# Altium PCB GZPCB_v4.PcbDoc
Units mm, origin at the board's own origin, x right, y up, seen from the top; angles counter-clockwise.
Board outline 134 x 134 mm, 4 copper layers (Top Layer, Internal Plane 1, Internal Plane 2, Bottom Layer), stack 0.462 mm thick; 151 components, 83 nets, 396 pads, 70 vias.
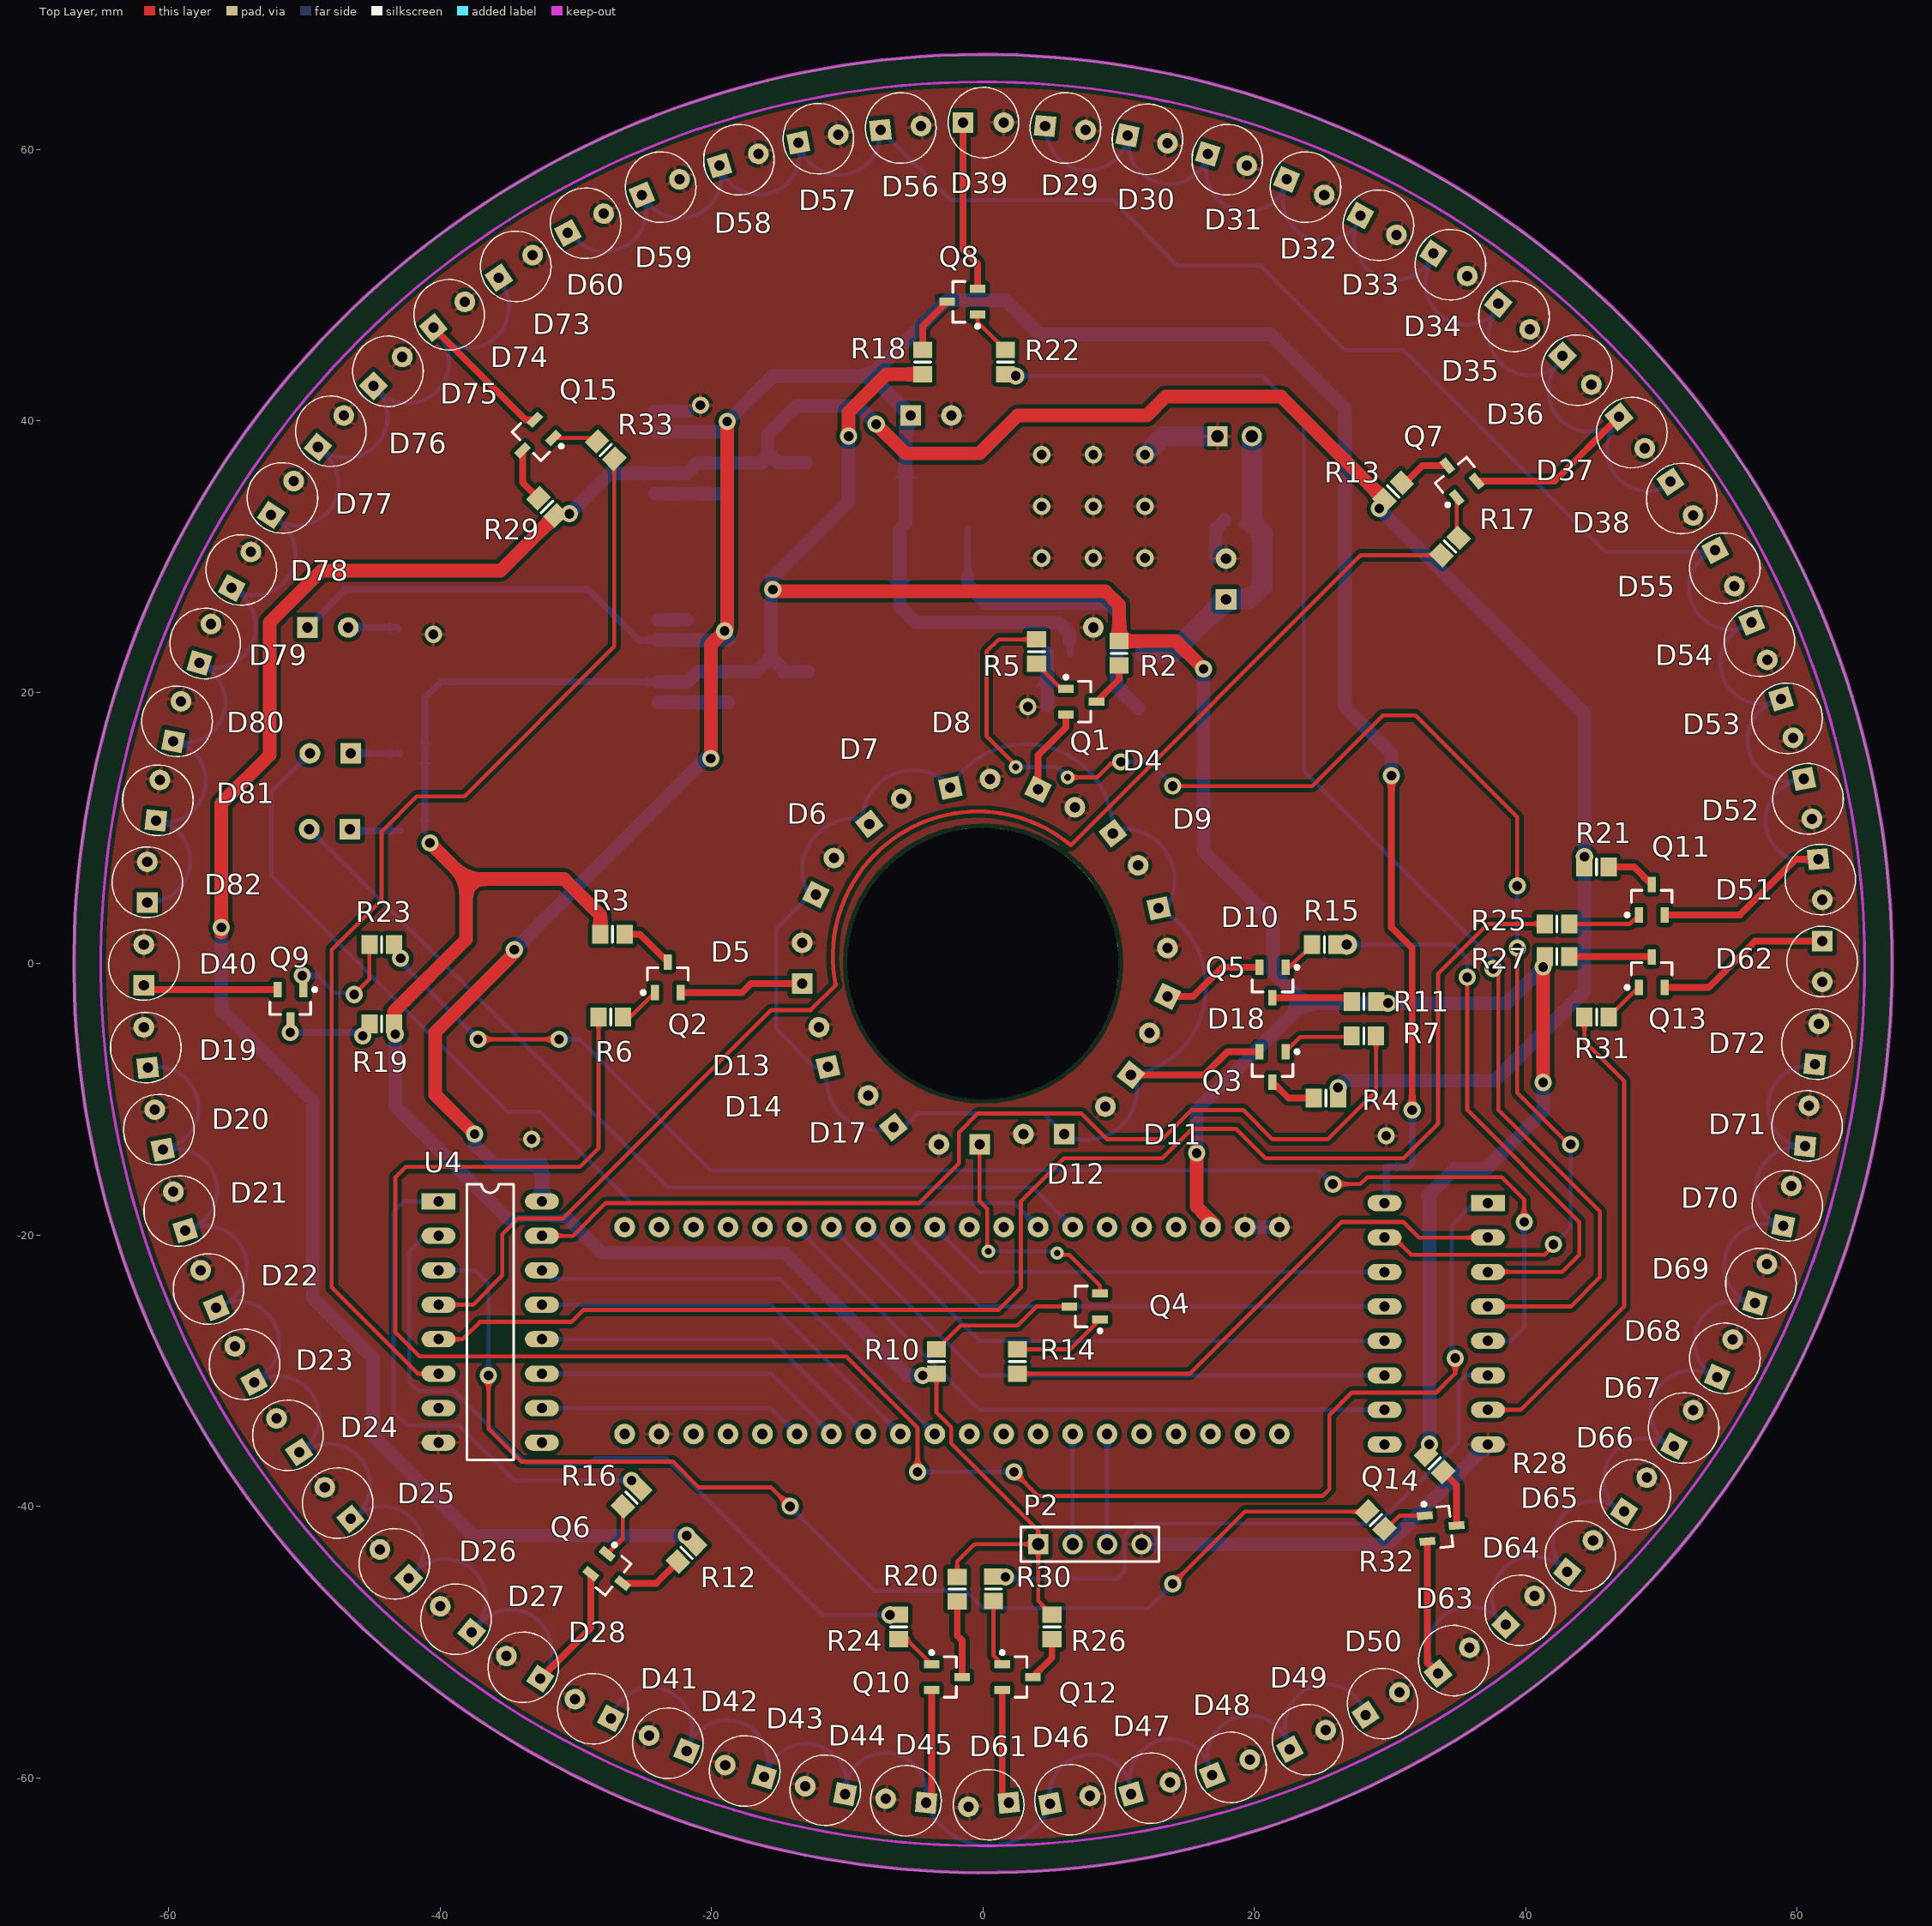
[diagram p0: Top Layer view]
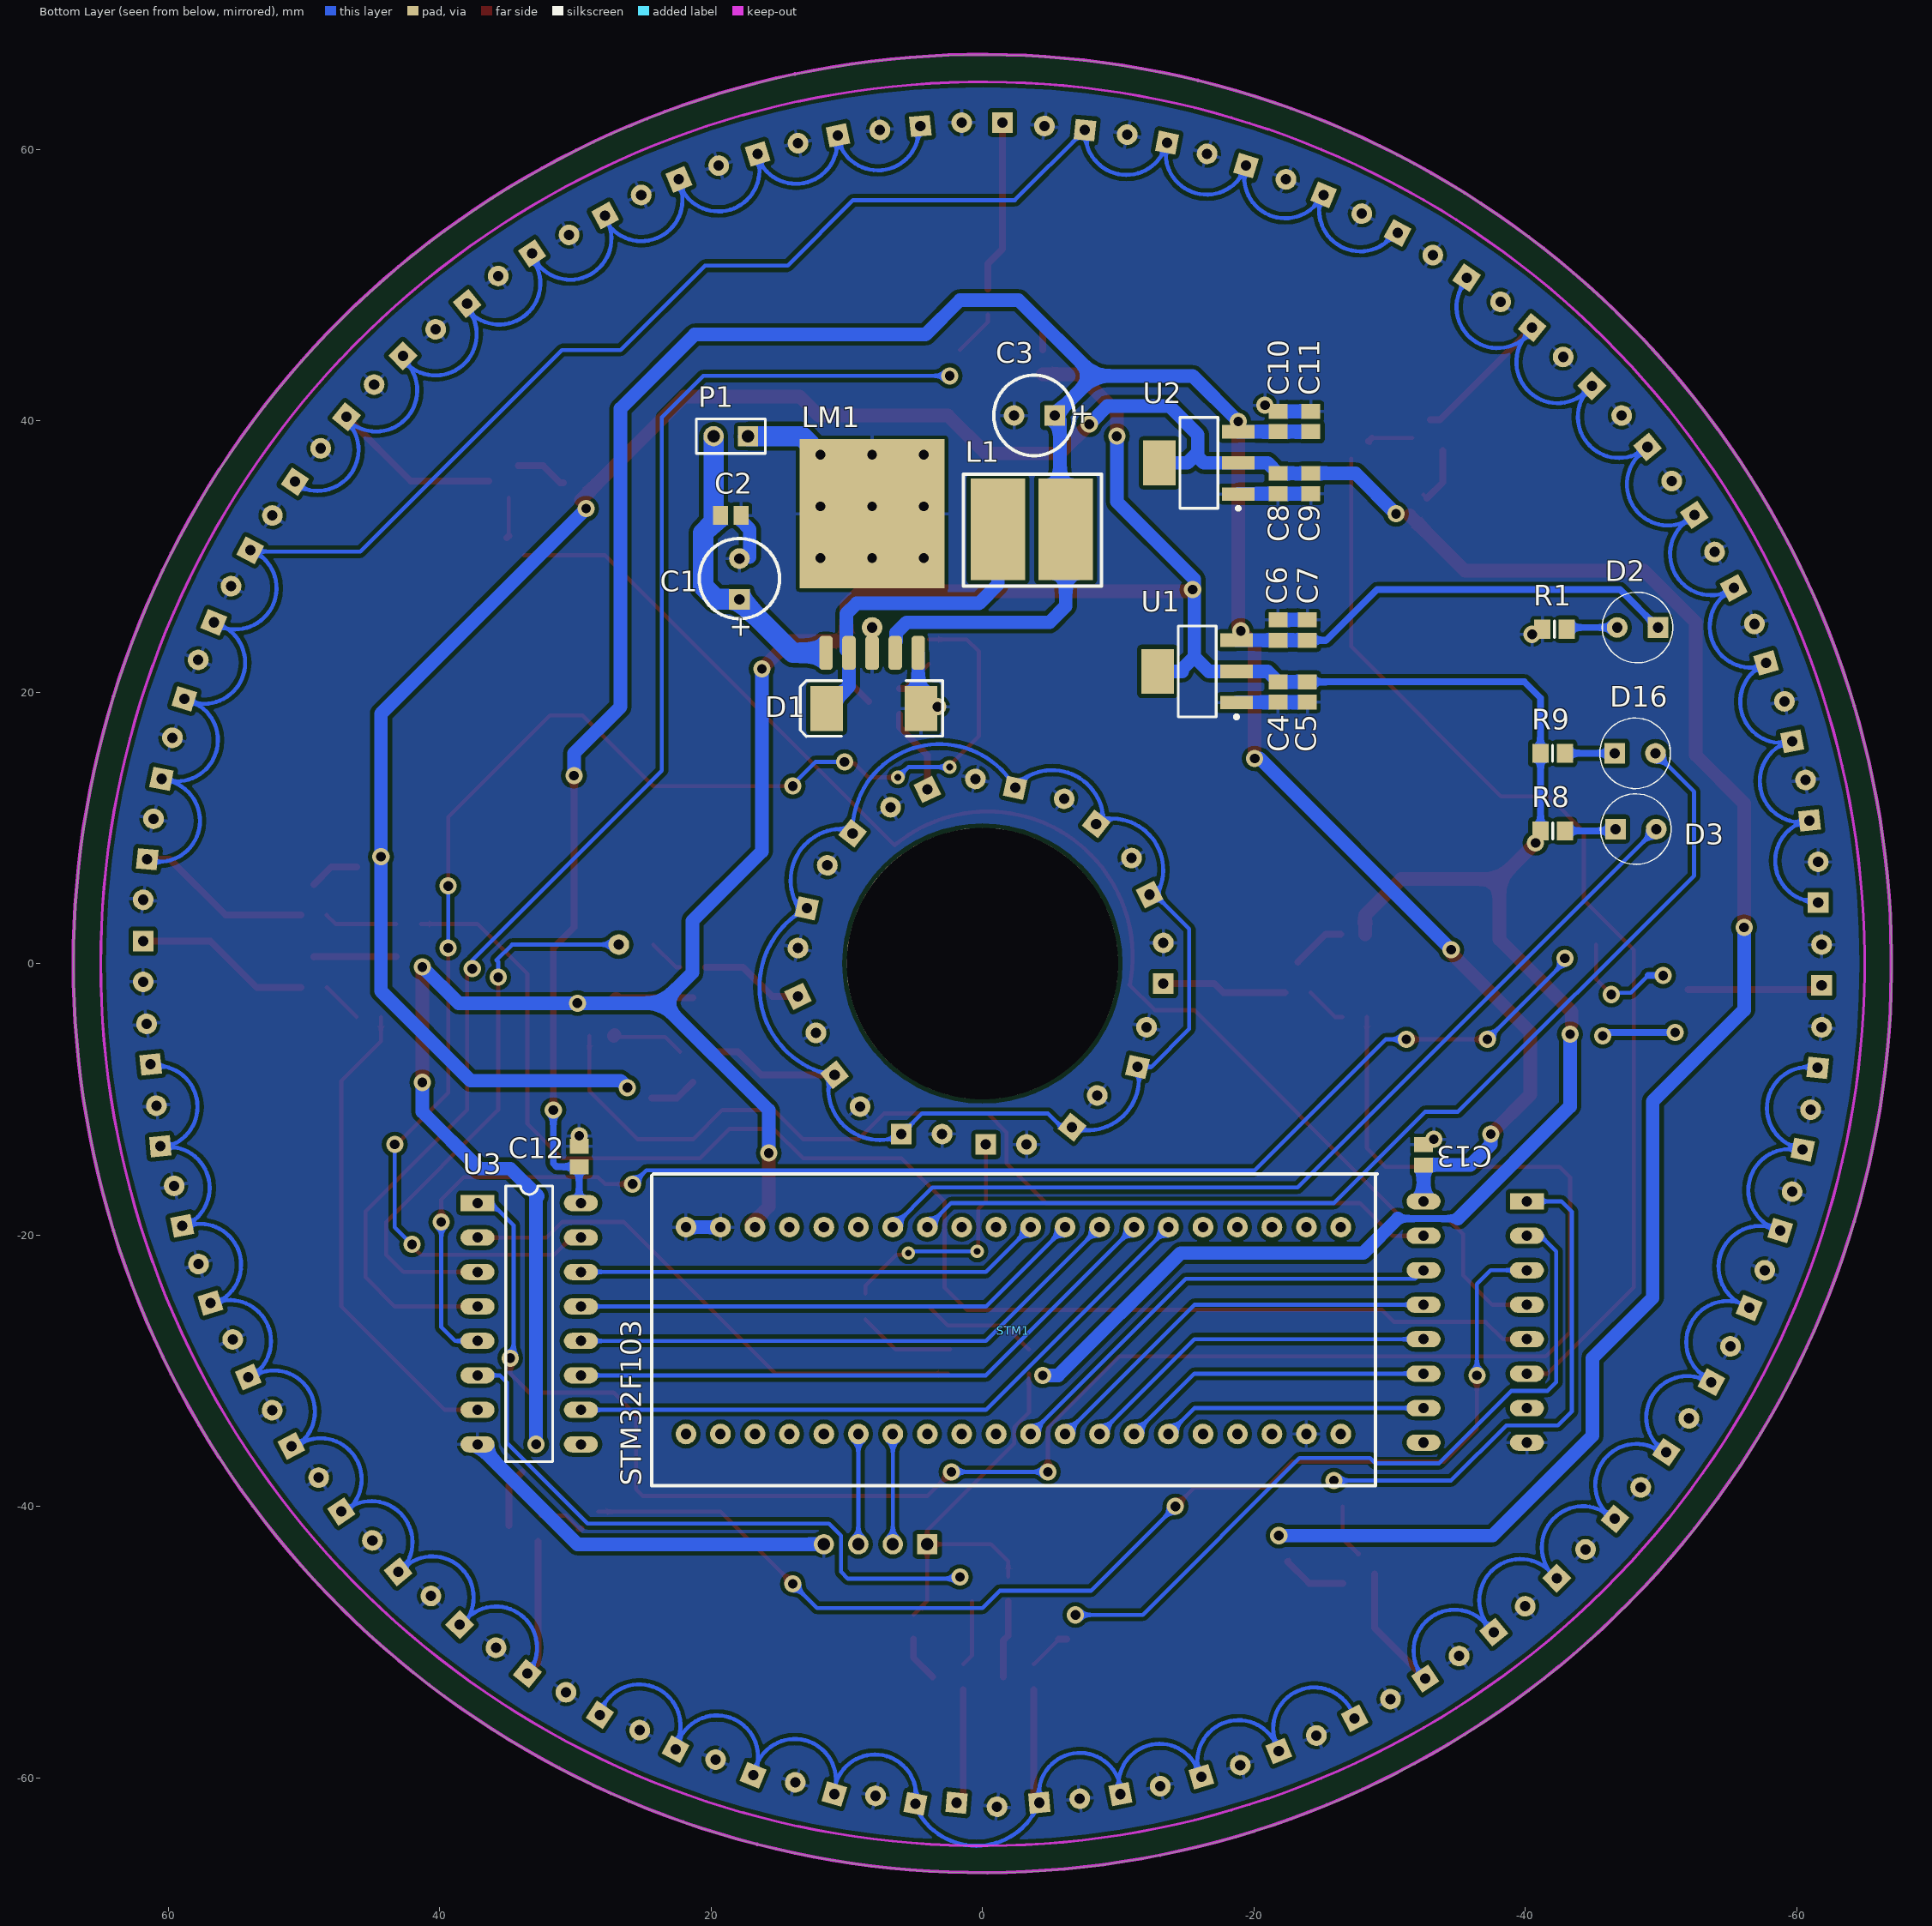
[diagram p1: Bottom Layer view, seen from below]
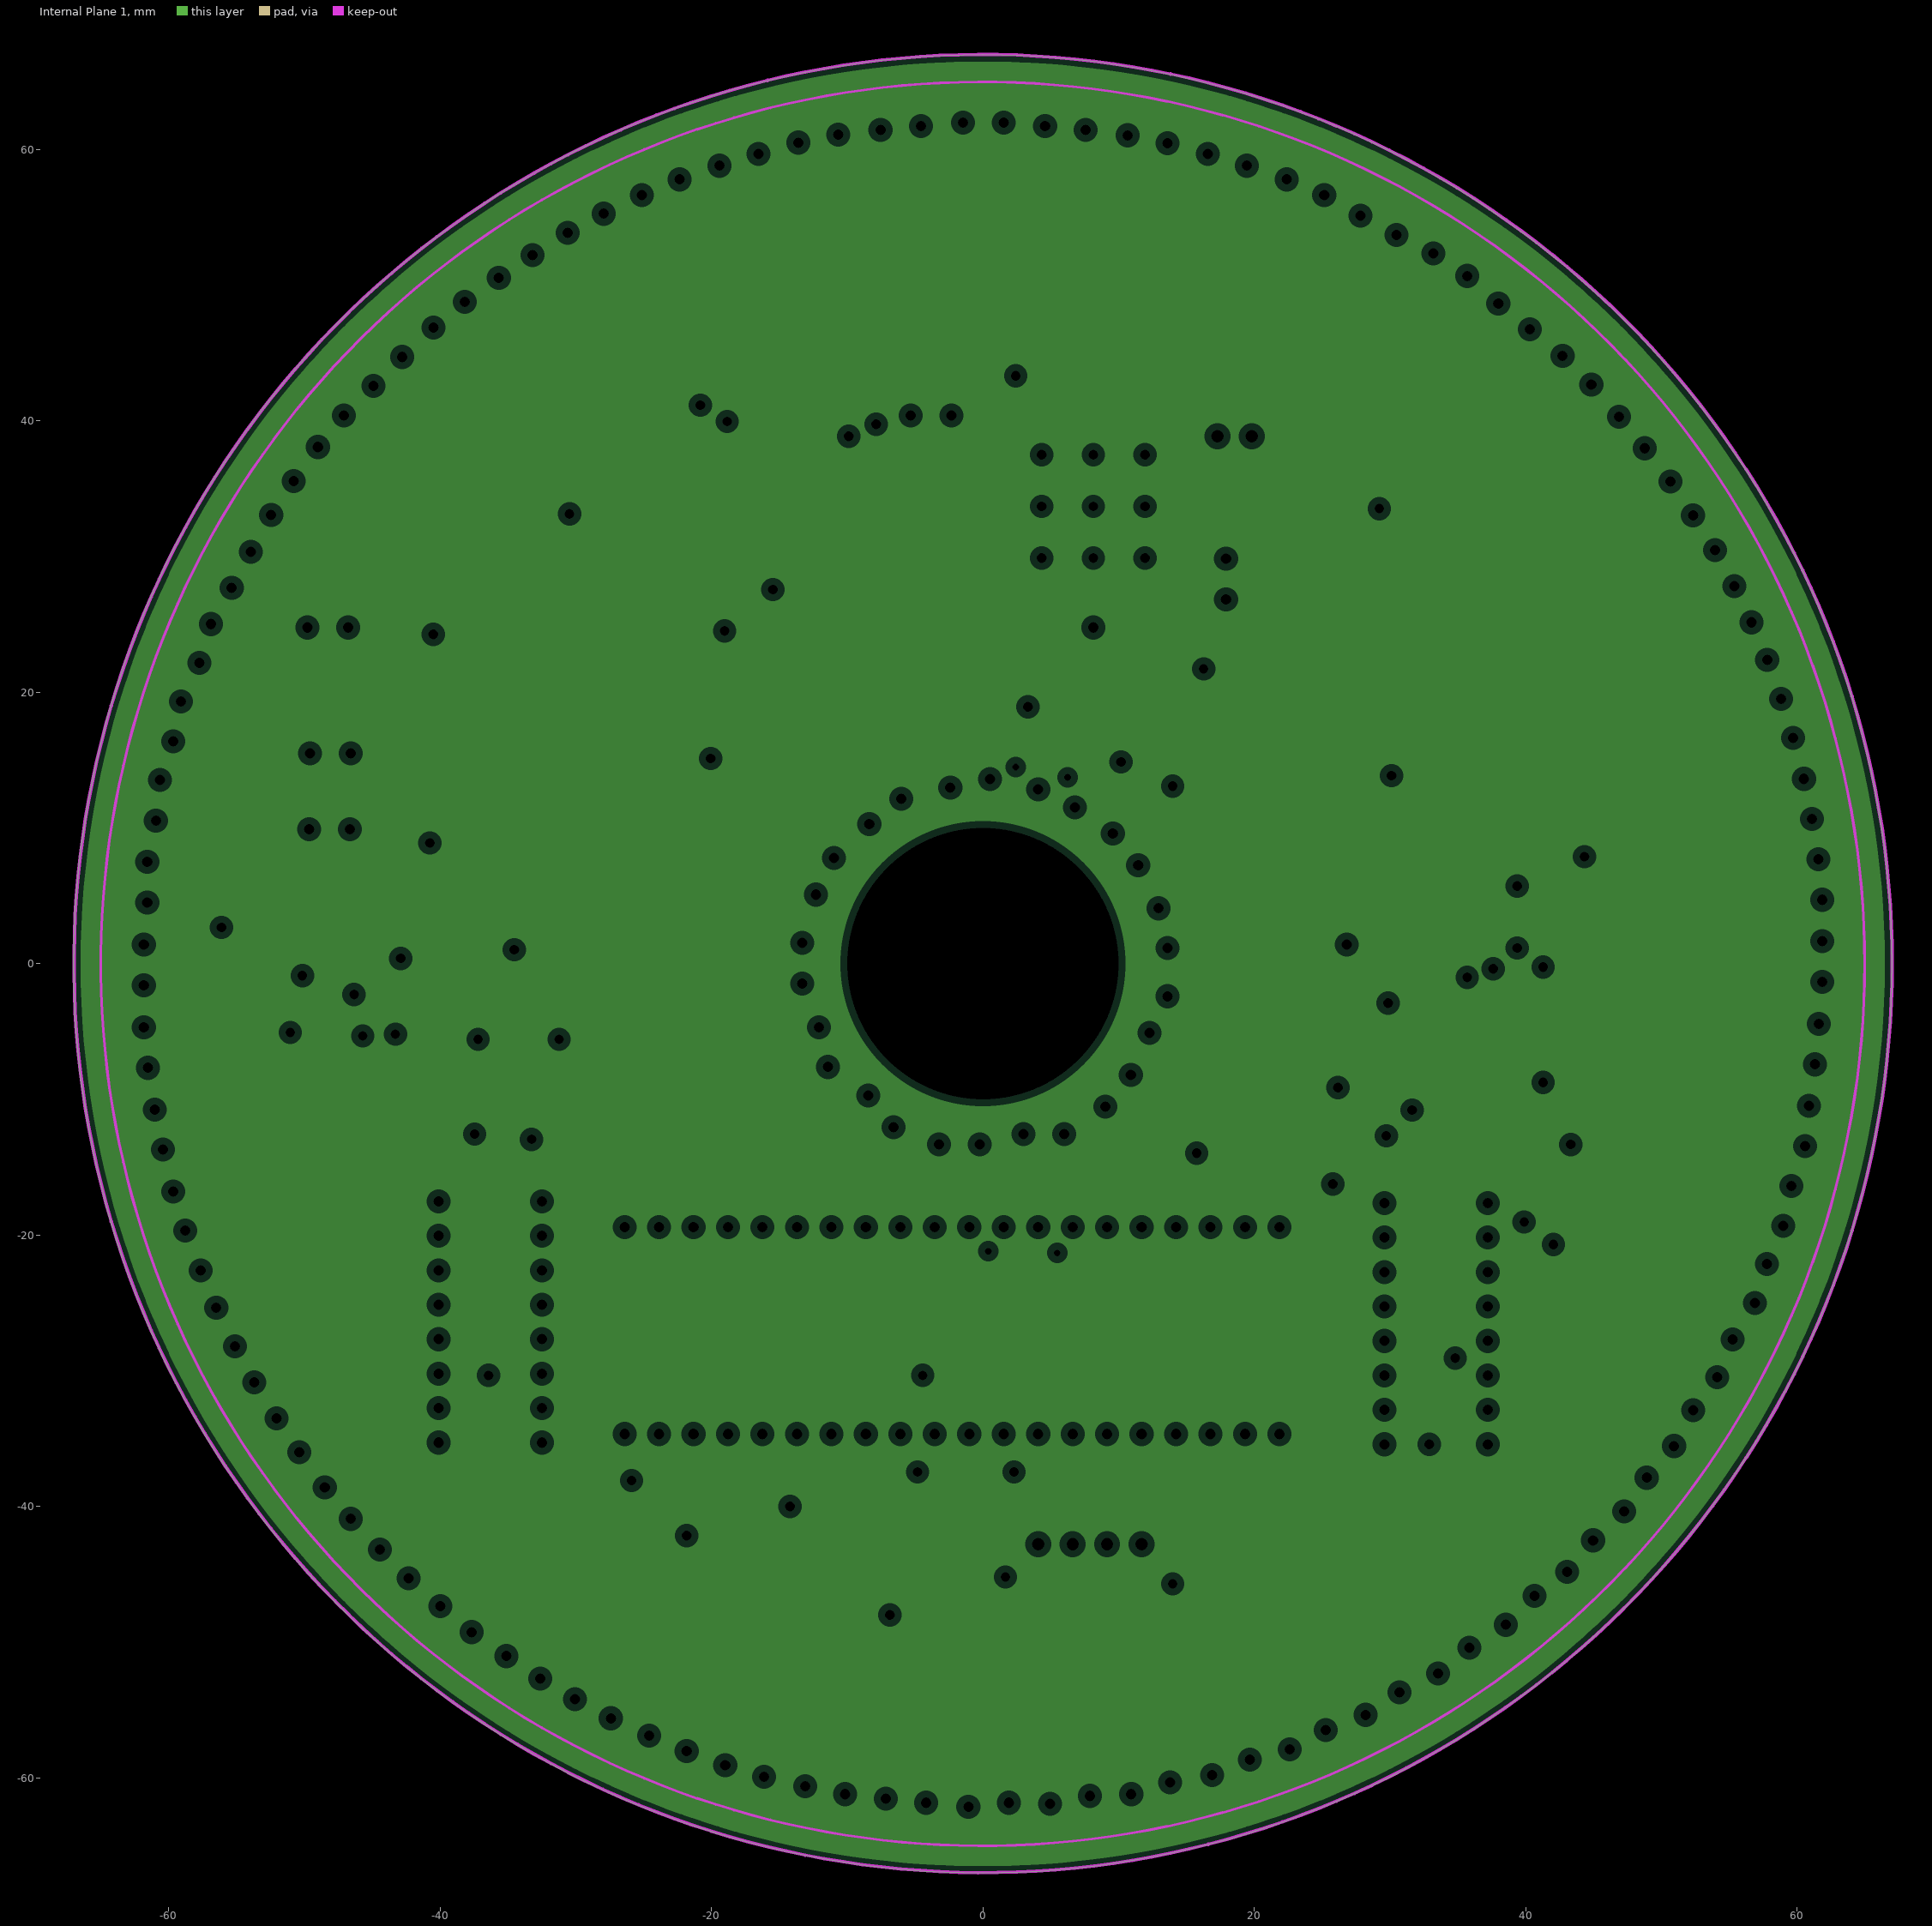
[diagram p2: Internal Plane 1, clearances drawn from the general rule]
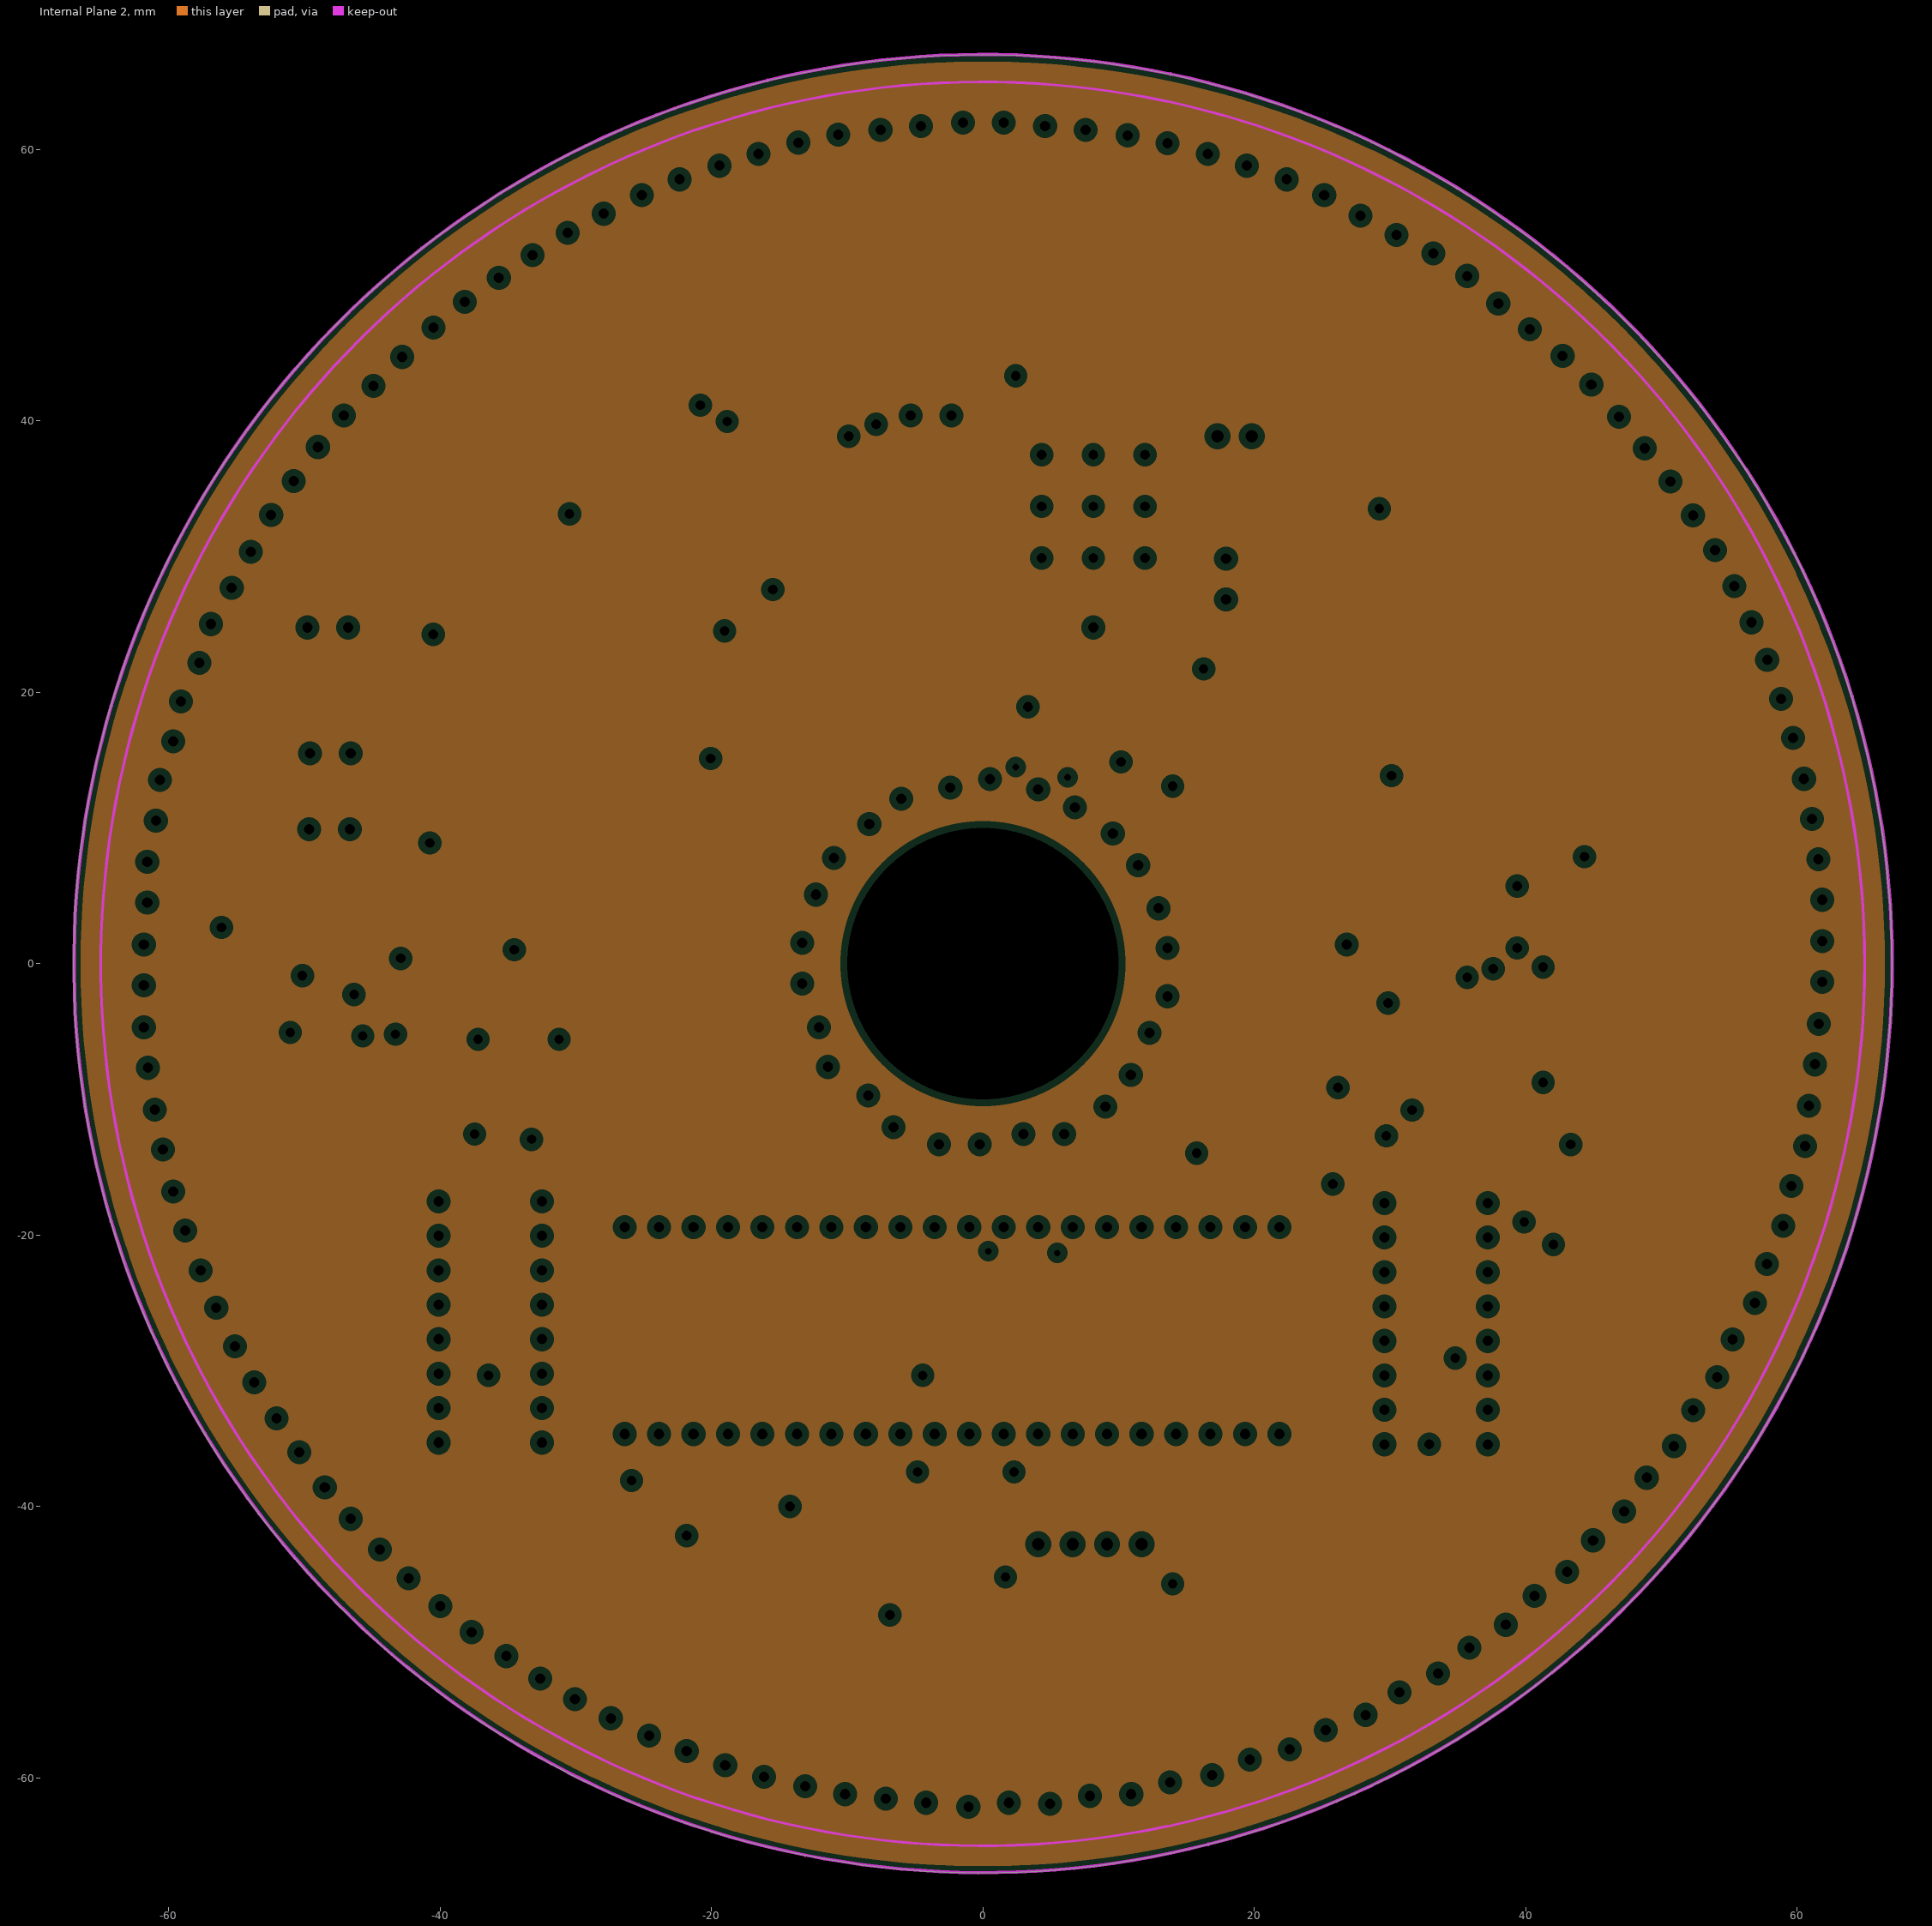
[diagram p3: Internal Plane 2, clearances drawn from the general rule]

## Layer stack, top to bottom
Top Solder: solder mask 0.0102, Solder Resist, Dk 3.5
Top Layer: signal copper 0.0356
Internal Plane 1: plane copper 0.0356
Internal Plane 2: plane copper 0.0356
Dielectric 1: dielectric 0.32, FR-4, Dk 4.8
Bottom Layer: signal copper 0.0356
Bottom Solder: solder mask 0.0102, Solder Resist, Dk 3.5

## Board outline
-0.024,-67.024 cw(c-0.024,-0.024) -67.024,-0.024 cw(c-0.024,-0.024) -0.024,66.976 cw(c-0.024,-0.024) 66.976,-0.024 cw(c-0.024,-0.024)

## Design rules (kind name [scope] priority, off if disabled: settings)
Clearance [All] p1: gap=0.3 ignorepadtopadclearanceinfootprint=FALSE
ComponentClearance [All] p1: gap=0.1 collisioncheckmode=3 verticalgap=0.254 showdistances=FALSE
PlaneClearance [All] p1: clearance=0.508
PlaneConnect [All] p1: planeconnectstyle=Relief reliefexpansion=0.508 reliefentries=4 reliefconductorwidth=0.254 reliefairgap=0.254
PolygonConnect [All] p1: connectstyle=Relief reliefconductorwidth=0.254 reliefentries=4 polygonreliefangle="90 Angle" airgapwidth=0.254
RoutingVias [All] p1: holewidth=0.8 width=1.6 viastyle="Through Hole" minholewidth=0.711 minwidth=1.27 maxholewidth=0.711 maxwidth=1.27
SolderMaskExpansion [All] p1: expansion=0.102
Width [All] p1: maxlimit=1.5 minlimit=0.3 preferedwidth=0.5 minimp=50.000000 maximp=50.000000 favimp=50.000000
27 further rules are at their usual default settings.

## Components (designator, comment, footprint, x,y, rotation, side; value= is the part's Value field where it differs from the comment)
C1 "220uF25V" 3mmcap 17.907,26.845 r90 bottom
C2 "0.1uF(104)" C0805 18.542,33.02 r180 bottom
C3 "220uF25V" 3mmcap -5.334,40.386 r0 bottom
C4 "0.1uF(104)" C0805 -21.794,20.007 r270 bottom value=0.1uF
C5 "100uf(107)" C0805 -23.953,20.007 r270 bottom value=22uF6.3V
C6 "0.1uF(104)" C0805 -21.794,24.579 r90 bottom value=0.1uF
C7 "100uf(107)" C0805 -23.953,24.579 r90 bottom value=100uF
C8 "0.1uF(104)" C0805 -21.794,35.374 r270 bottom value=0.1uF
C9 "100uf(107)" C0805 -24.207,35.374 r270 bottom value=22uF6.3V
C10 "0.1uF(104)" C0805 -21.794,39.946 r90 bottom value=0.1uF
C11 "100uf(107)" C0805 -24.207,39.946 r90 bottom value=100uF
C12 "0.1uF(104)" C0805 29.718,-14.224 r90 bottom value=104
C13 "0.1uF(104)" C0805 -32.512,-14.097 r90 bottom value=104
D1 "ES2D" SMC 8.001,18.796 r0 bottom
D2 "PWR" 3mm -49.784,24.765 r0 bottom
D3 "BLUE" 3mm -46.657,9.906 r180 bottom
D4 "LED0" 5mm 4.064,12.827 r334.1 top
D5 "LED0" 5mm -13.335,-1.476 r90 top
D6 "LED0" 5mm -12.319,5.08 r63.7 top
D7 "LED0" 5mm -8.382,10.287 r38.2 top
D8 "LED0" 5mm -2.413,12.954 r12.5 top
D9 "LED0" 5mm 9.567,9.59 r308.4 top
D10 "LED0" 5mm 12.94,4.072 r282.5 top
D11 "LED0" 5mm 10.893,-8.2 r231.3 top
D12 "LED0" 5mm 5.969,-12.573 r179.9 top
D13 "LED0" 5mm -11.43,-7.62 r102.8 top
D14 "LED0" 5mm -6.604,-12.065 r128.5 top
D16 "GREEN" 3mm -46.609,15.494 r180 bottom
D17 "LED0" 5mm -0.254,-13.335 r180 top
D18 "LED0" 5mm 13.589,-2.413 r243.9 top
D19 "LED0" 3mm -61.555,-7.685 r95.62 top
D20 "LED0" 3mm -60.452,-13.716 r101.25 top
D21 "LED0" 3mm -58.801,-19.685 r106.88 top
D22 "LED0" 3mm -56.51,-25.378 r112.5 top
D23 "LED0" 3mm -53.721,-30.861 r118.12 top
D24 "LED0" 3mm -50.403,-36.022 r123.75 top
D25 "LED0" 3mm -46.611,-40.927 r129.38 top
D26 "LED0" 3mm -42.329,-45.301 r135 top
D27 "LED0" 3mm -37.686,-49.274 r140.62 top
D28 "LED0" 3mm -32.639,-52.705 r146.25 top
D29 "LED0" 3mm 4.572,61.722 r354.38 top
D30 "LED0" 3mm 10.647,61.037 r348.75 top
D31 "LED0" 3mm 16.56,59.672 r343.12 top
D32 "LED0" 3mm 22.374,57.79 r337.5 top
D33 "LED0" 3mm 27.813,55.118 r331.88 top
D34 "LED0" 3mm 33.193,52.34 r326.25 top
D35 "LED0" 3mm 37.973,48.641 r320.62 top
D36 "LED0" 3mm 42.71,44.793 r315 top
D37 "LED0" 3mm 46.865,40.292 r309.38 top
D38 "LED0" 3mm 50.657,35.514 r303.75 top
D39 "LED0" 3mm -1.476,61.976 r0 top
D40 "LED0" 3mm -61.849,-1.603 r90 top
D41 "LED0" 3mm -27.432,-55.626 r151.88 top
D42 "LED0" 3mm -21.844,-58.039 r157.5 top
D43 "LED0" 3mm -16.129,-59.944 r163.12 top
D44 "LED0" 3mm -10.16,-61.214 r168.75 top
D45 "LED0" 3mm -4.191,-61.849 r174.38 top
D46 "LED0" 3mm 4.932,-61.926 r11.25 top
D47 "LED0" 3mm 10.922,-61.214 r16.88 top
D48 "LED0" 3mm 16.891,-59.817 r22.5 top
D49 "LED0" 3mm 22.606,-57.912 r28.12 top
D50 "LED0" 3mm 28.194,-55.372 r33.75 top
D51 "LED0" 3mm 61.555,7.685 r275.62 top
D52 "LED0" 3mm 60.502,13.61 r281.25 top
D53 "LED0" 3mm 58.819,19.508 r286.88 top
D54 "LED0" 3mm 56.642,25.146 r292.5 top
D55 "LED0" 3mm 53.958,30.459 r298.12 top
D56 "LED0" 3mm -7.558,61.428 r5.62 top
D57 "LED0" 3mm -13.61,60.502 r11.25 top
D58 "LED0" 3mm -19.431,58.801 r16.88 top
D59 "LED0" 3mm -25.146,56.642 r22.5 top
D60 "LED0" 3mm -30.607,53.848 r28.12 top
D61 "LED0" 3mm 1.905,-61.849 r185.62 top
D62 "LED0" 3mm 61.849,1.651 r270 top
D63 "LED0" 3mm 33.528,-52.324 r39.38 top
D64 "LED0" 3mm 38.519,-48.73 r45 top
D65 "LED0" 3mm 43.053,-44.831 r50.62 top
D66 "LED0" 3mm 47.244,-40.386 r56.25 top
D67 "LED0" 3mm 50.927,-35.56 r61.88 top
D68 "LED0" 3mm 54.102,-30.48 r67.5 top
D69 "LED0" 3mm 56.896,-25.019 r73.12 top
D70 "LED0" 3mm 58.978,-19.325 r78.75 top
D71 "LED0" 3mm 60.579,-13.462 r84.38 top
D72 "LED0" 3mm 61.301,-7.431 r84.38 top
D73 "LED0" 3mm -35.687,50.546 r33.75 top
D74 "LED0" 3mm -40.513,46.863 r39.38 top
D75 "LED0" 3mm -44.92,42.583 r45 top
D76 "LED0" 3mm -49.02,38.067 r50.62 top
D77 "LED0" 3mm -52.467,33.066 r56.25 top
D78 "LED0" 3mm -55.372,27.686 r61.88 top
D79 "LED0" 3mm -57.767,22.148 r73.12 top
D80 "LED0" 3mm -59.69,16.383 r78.75 top
D81 "LED0" 3mm -60.96,10.541 r84.38 top
D82 "LED0" 3mm -61.595,4.493 r90 top
L1 "Inductor" 7*7mm贴片电感 -1.143,32.004 r180 bottom value=33uH
LM1 "U1" TO-263-5 8.128,22.897 r180 bottom
P1 "Header 2" HDR1X2 17.272,38.862 r0 bottom
P2 "Header 4" HDR1X4 4.064,-42.799 r0 top
Q1 "QNPN" SOT-23B_N 7.239,19.304 r0 top
Q2 "QNPN" SOT-23B_N -23.241,-1.016 r90 top
Q3 "QNPN" SOT-23B_N 21.336,-7.62 r270 top
Q4 "QNPN" SOT-23B_N 7.493,-25.273 r180 top
Q5 "QNPN" SOT-23B_N 21.336,-1.397 r270 top
Q6 "QNPN" SOT-23B_N -27.432,-44.958 r320.62 top
Q7 "QNPN" SOT-23B_N 34.925,35.814 r129.38 top
Q8 "QNPN" SOT-23B_N -1.524,48.768 r180 top
Q9 "QNPN" SOT-23B_N -51.054,-3.048 r270 top
Q10 "QNPN" SOT-23B_N -2.667,-52.578 r0 top
Q11 "QNPN" SOT-23B_N 49.276,4.699 r90 top
Q12 "QNPN" SOT-23B_N 2.54,-52.578 r0 top
Q13 "QNPN" SOT-23B_N 49.276,-0.635 r90 top
Q14 "QNPN" SOT-23B_N 33.782,-41.529 r5.62 top
Q15 "QNPN" SOT-23B_N -33.147,38.608 r225 top
R1 "Res2" 6-0805_N -42.164,24.638 r180 bottom value=1K
R2 "Res2" 6-0805_N 10.033,22.86 r270 top value=150
R3 "Res2" 6-0805_N -27.305,2.159 r0 top value=150
R4 "Res2" 6-0805_N 25.273,-9.906 r180 top value=15
R5 "Res2" 6-0805_N 3.937,22.987 r90 top value=1K
R6 "Res2" 6-0805_N -27.432,-3.937 r180 top value=1K
R7 "Res2" 6-0805_N 28.067,-5.334 r0 top value=1K
R8 "Res2" 6-0805_N -42.037,9.779 r0 bottom value=330R
R9 "Res2" 6-0805_N -42.026,15.494 r0 bottom value=330R
R10 "Res2" 6-0805_N -3.429,-29.337 r90 top value=150
R11 "Res2" 6-0805_N 28.078,-2.794 r180 top value=150
R12 "Res2" 6-0805_N -21.844,-43.434 r225 top value=15
R13 "Res2" 6-0805_N 30.226,34.798 r45 top value=15
R14 "Res2" 6-0805_N 2.54,-29.337 r270 top value=1K
R15 "Res2" 6-0805_N 25.157,1.397 r0 top value=1K
R16 "Res2" 6-0805_N -25.908,-39.37 r45 top value=1K
R17 "Res2" 6-0805_N 34.417,30.734 r225 top value=1K
R18 "Res2" 6-0805_N -4.445,44.323 r90 top value=150
R19 "Res2" 6-0805_N -44.323,-4.445 r180 top value=150
R20 "Res2" 6-0805_N -1.905,-46.101 r270 top value=15
R21 "Res2" 6-0805_N 45.212,7.112 r0 top value=15
R22 "Res2" 6-0805_N 1.651,44.323 r270 top value=1K
R23 "Res2" 6-0805_N -44.323,1.397 r0 top value=1K
R24 "Res2" 6-0805_N -6.223,-48.895 r90 top value=1K
R25 "Res2" 6-0805_N 42.291,2.921 r180 top value=1K
R26 "Res2" 6-0805_N 5.08,-48.895 r270 top value=150
R27 "Res2" 6-0805_N 42.291,0.508 r0 top value=150
R28 "Res2" 6-0805_N 33.274,-36.83 r315 top value=15
R29 "Res2" 6-0805_N -32.131,33.655 r135 top value=15
R30 "Res2" 6-0805_N 0.762,-46.09 r90 top value=1K
R31 "Res2" 6-0805_N 45.223,-3.937 r180 top value=1K
R32 "Res2" 6-0805_N 28.956,-41.021 r135 top value=1K
R33 "Res2" 6-0805_N -27.813,37.846 r315 top value=1K
STM1 "STM32F103C8核心板" STM32F103C8T6 21.844,-34.671 r90 bottom
U1 "AMS1117-3.3" SOT223_N -15.825,21.531 r0 bottom
U2 "AMS1117-3.3" SOT223_N -15.952,36.898 r0 bottom
U3 "74HC595" dip16 37.211,-17.653 r180 bottom
U4 "74HC595" dip16 -40.132,-17.526 r0 top

## Footprints (in the part's own frame and the unit in brackets; to place one, negate y for a bottom-side part, rotate by r counter-clockwise, add the part's x,y. Pads: shape width x height; smd on the part's side, far side on the other; paste and mask are expansions set on the pad)
3mm [mil]
  rect 60x60 hole 30: 1(0,0)
  round 60 hole 30: 2(118.11,0)
  silkscreen extent -43,-102 161,102
3mmcap [mil]
  rect 60x60 hole 30: 1(0,0)
  round 60 hole 30: 2(118.11,0)
  silkscreen extent -57,-117 177,117
5mm [mil]
  rect 60x60 hole 30: 1(0,0)
  round 60 hole 30: 2(118.11,0)
6-0805_N [mm] "Chip Resistor, Body 2.0x1.2mm, IPC Medium Density"
  rect 1.2x1.4 smd: 1(-0.9,0) 2(0.9,0)
  silkscreen extent 0,-0.6 0,0.6, body extent -1.07,-0.7 1.08,0.7, height 0.7
7*7mm贴片电感 [mm]
  rect 4x7.5 smd: 1(0,0) 2(5,0)
  silkscreen extent -2.54,-4.19 7.62,4.06
C0805 [mm] "Chip Capacitor, Body 2.0x1.3mm, IPC High Density"
  rect 1.1x1.4 smd: 1(-0.75,0) 2(0.75,0)
  body extent -1.1,-0.72 1.1,0.72, height 1.4
dip16 [mm]
  rect 2.5x1.2 hole 0.762: 1(0,0)
  oval 2.5x1.2 hole 0.762: 2(0,-2.54) 3(0,-5.08) 4(0,-7.62) 5(0,-10.16) 6(0,-12.7) 7(0,-15.24) 8(0,-17.78) 9(7.62,-17.78) 10(7.62,-15.24) 11(7.62,-12.7) 12(7.62,-10.16) 13(7.62,-7.62) 14(7.62,-5.08) 15(7.62,-2.54) 16(7.62,0)
  silkscreen extent 2.08,-19.05 5.54,1.27
HDR1X2 [mm] "Connector; Header; 2 Position"
  rect 1.5x1.5 hole 0.9: 1(0,0)
  round 1.5 hole 0.9: 2(2.54,0)
  silkscreen extent -1.27,-1.27 3.81,1.27
HDR1X4 [mm] "Connector; Header; 4 Position"
  rect 1.5x1.5 hole 0.9: 1(0,0)
  round 1.5 hole 0.9: 2(2.54,0) 3(5.08,0) 4(7.62,0)
  silkscreen extent -1.27,-1.27 8.89,1.27
SMC [mm] "DO-214-AB/SMC; 2 C-Bend Leads; Body 7.9 x 5.9 mm, inc. leads (LxW)"
  rect 2.4x3.3 smd: 1(-3.475,0) 2(3.475,0)
  silkscreen extent -5.07,-2.05 5.43,2.05
SOT223_N [mm] "SOT223, 4-Leads, Body 6.5x3.5mm, Pitch 2.3mm, Lead Span 7mm, IPC Medium Density"
  rect 2.4x1 smd: 1(-2.9,2.3) 2(-2.9,0) 3(-2.9,-2.3)
  rect 2.4x3.3 smd: 4(2.9,0)
  silkscreen extent -3.02,-3.35 1.4,3.47, body extent -1.85,-3.35 1.85,3.35, height 1.7
SOT-23B_N [mm] "SOT23, 3-Leads, Body 2.9x1.3mm, Pitch 0.95mm, Lead Span 2.4mm, IPC Medium Density"
  rect 1.15x0.6 smd: 1(-1.125,0.95) 2(-1.125,-0.95) 3(1.125,0)
  silkscreen extent -1.25,-1.5 0.7,1.92, body extent -0.7,-1.5 0.7,1.5, height 1.14
STM32F103C8T6 [mil]
  round 60 hole 30: 1(0,0) 2(0,-100) 3(0,-200) 4(0,-300) 5(0,-400) 6(0,-500) 7(0,-600) 8(0,-700) 9(0,-800) 10(0,-900) 11(0,-1000) 12(0,-1100) 13(0,-1200) 14(0,-1300) 15(0,-1400) 16(0,-1500) 17(0,-1600) 18(0,-1700) 19(0,-1800) 20(0,-1900) 21(600,-1900) 22(600,-1800) 23(600,-1700) 24(600,-1600) 25(600,-1500) 26(600,-1400) 27(600,-1300) 28(600,-1200) 29(600,-1100) 30(600,-1000) 31(600,-900) 32(600,-800) 33(600,-700) 34(600,-600) 35(600,-500) 36(600,-400) 37(600,-300) 38(600,-200) 39(600,-100) 40(600,0)
  silkscreen extent -150,-2005 755,100
TO-263-5 [mm]
  rrect50% 1x2.5 smd: 1(-3.4,0) 2(-1.7,0) 3(0,0) 4(1.7,0) 5(3.4,0)
  rect 10.7x11 smd: 3(0,10.25)

## Part data
C1 C3: library part "Cap Pol1", "直插铝电解电容", LatestRevisionDate=17-Jul-2002, LatestRevisionNote="Re-released for DXP Platform.", PackageDescription="Polarized Capacitor (Radial); 2 Leads", PackageReference=RB7.6-15, Published=8-Jun-2000, Publisher="Altium Limited"
C2 C4 C5 C6 C7 C8 C9 C10 C11 C12 C13: library part "Cap Pol3", "Polarized Capacitor (Surface Mount)", LatestRevisionDate=29-May-2009, LatestRevisionNote="IPC-7351 Footprint Added.", PackageDescription="Chip Capacitor", PackageReference=C0805, Published=8-Jun-2000, Publisher="Altium Limited"
D1: library part Diode, "Diode", Code_JEDEC=DO-214-AB, LatestRevisionDate=17-Jul-2002, LatestRevisionNote="Re-released for DXP Platform.", PackageDescription="DO-214-AB/SMC; 2 C-Bend Leads; Body 7.9 x 5.9 mm, inc. leads (LxW)", PackageReference=SMC, PackageVersion=Sep-1996, Published=8-Jun-2000, Publisher="Altium Limited"
D2: library part LED0, "RED-LED", LatestRevisionDate=08-Jul-2005, LatestRevisionNote="Mech Layer 1 removed.", PackageDescription="LED; 2 Leads", PackageReference=LED-0, Published=8-Jun-2000, Publisher="Altium Limited"
D3: library part LED0, "BLUE-LED", LatestRevisionDate=08-Jul-2005, LatestRevisionNote="Mech Layer 1 removed.", PackageDescription="LED; 2 Leads", PackageReference=LED-0, Published=8-Jun-2000, Publisher="Altium Limited"
D4 D5 D6 D7 D8 D9 D10 D11 D12 D13 D14 D17 D18: "850nm IR-LED", LatestRevisionDate=08-Jul-2005, LatestRevisionNote="Mech Layer 1 removed.", PackageDescription="LED; 2 Leads", PackageReference=LED-0, Published=8-Jun-2000, Publisher="Altium Limited"
D16: library part LED0, "GREEN-LED", LatestRevisionDate=08-Jul-2005, LatestRevisionNote="Mech Layer 1 removed.", PackageDescription="LED; 2 Leads", PackageReference=LED-0, Published=8-Jun-2000, Publisher="Altium Limited"
D19 D20 D21 D22 D23 D24 D25 D26 D27 D28 D29 D30 D31 D32 D33 D34 D35 D36 D37 D38 D39 D40 D41 D42 D43 D44 D45 D46 D47 D48 D49 D50 D51 D52 D53 D54 D55 D56 D57 D58 D59 D60 D61 D62 D63 D64 D65 D66 D67 D68 D69 D70 D71 D72 D73 D74 D75 D76 D77 D78 D79 D80 D81 D82: "940nm IR-LED", LatestRevisionDate=08-Jul-2005, LatestRevisionNote="Mech Layer 1 removed.", PackageDescription="LED; 2 Leads", PackageReference=LED-0, Published=8-Jun-2000, Publisher="Altium Limited"
L1: "33uH", Code_IEC=1005, Code_JEITA=0402, LatestRevisionDate=29-May-2009, LatestRevisionNote="IPC-7351 Footprint Added.", PackageDescription="Chip Inductor", PackageReference=0402-A, Published=8-Jun-2000, Publisher="Altium Limited"
LM1: library part LM2596, "LM2596-5.0"
P1: "电源接口", LatestRevisionDate=17-Jul-2002, LatestRevisionNote="Re-released for DXP Platform.", Publisher="Altium Limited"
P2: "串口接口", LatestRevisionDate=17-Jul-2002, LatestRevisionNote="Re-released for DXP Platform.", Publisher="Altium Limited"
Q1 Q2 Q3 Q4 Q5 Q6 Q7 Q8 Q9 Q10 Q11 Q12 Q13 Q14 Q15: "NPN Bipolar Transistor", LatestRevisionDate=29-May-2009, LatestRevisionNote="IPC-7351 Footprint Added.", PackageDescription="3-Pin SOT-23 Package 0.95 mm Pitch, 2.4 mm Lead Span", PackageReference=SOT-23B, PackageVersion=Aug-1999, Published=8-Jun-2000, Publisher="Altium Limited"
R1 R2 R3 R4 R5 R6 R7 R8 R9 R10 R11 R12 R13 R14 R15 R16 R17 R18 R19 R20 R21 R22 R23 R24 R25 R26 R27 R28 R29 R30 R31 R32 R33: "Resistor", LatestRevisionDate=17-Jul-2002, LatestRevisionNote="Re-released for DXP Platform.", PackageDescription="Axial Device, Thru-Hole; 2 Leads; 0.4 in Pin Spacing", PackageReference=AXIAL-0.4, Published=8-Jun-2000, Publisher="Altium Limited"

## Free pads (board coordinates)
  round 20 hole 20 unplated: 17(0,0)
  round 1.524 hole 0.762: 18(8.128,24.765) 19(26.797,1.397)

## Via types
v1: diameter 1.27, hole 0.711, Top Layer to Bottom Layer, 66 vias
v2: diameter 1, hole 0.5, Top Layer to Bottom Layer, 4 vias

## Nets (pads, with @x,y where several pads share a name; then routed paths per layer and width w, separated by ;. In a path a pad name is that pad's centre, name@x,y a point inside that pad or via, vN(x,y) a via of type N, cw(c..) or ccw(c..) an arc to the next point about the centre after c; other vN are vias at no path point)
12V: C1.1 C2.1 LM1.1 P1.2 | length 22
  Bottom Layer w1.5: LM1.1@11.938,22.897 13.959,22.897 C1.1 19.606,26.845 20.574,27.813 20.574,31.738 19.812,32.5 P1.2
+3.3V_1: C4.1 C5.1 P2.1 R2.1 R3.1 R8.2 R9.2 R10.1 R11.1 R18.1 R19.1 R20.1 R26.1 R27.1 R28.1 STM1.38 U1.2 U1.4 | length 320.1
  Top Layer w0.3: R10.1 -3.429,-33.084 -2.344,-34.169 -2.344,-35.375 4.064,-41.783 P2.1 ; R20.1 -1.905,-44.069 -0.635,-42.799 P2.1 ; R26.1 4.064,-46.979 P2.1
  Top Layer w1: R19.1 -43.423,-3.545 -38.1,1.778 -38.1,6.223 ; v1(-40.767,8.89) -38.1,6.223 ; R3.1 -28.205,3.567 -30.861,6.223 -38.1,6.223 ; v1@-15.621,27.686 v1(-15.494,27.559) -15.367,27.432 9.017,27.432 10.033,26.416 R2.1 14.213,23.76 v1@16.129,21.844 ; v1(-9.906,38.862) -9.906,40.64 -7.123,43.423 R18.1 ; v1(15.748,-13.97) 15.748,-17.907 17.018,-19.177 STM1.38 ; v1(41.275,-8.763) v1(41.275,-0.254)
  Bottom Layer w0.3: v1(-4.445,-30.353) v1@-4.191,-30.353
  Bottom Layer w0.5: R8.2 -41.137,15.483 R9.2 -41.126,19.58 -39.949,20.757 C5.1 ; -35.052,-18.796 -30.607,-18.796
  Bottom Layer w1: v1(-43.307,-5.207) -43.307,-10.541 -35.052,-18.796 ; -30.607,-18.796 -28.067,-21.336 -14.605,-21.336 -5.588,-30.353 v1(-4.445,-30.353) ; C5.1 C4.1 -21.02,21.531 U1.2 -16.696,21.531 -15.621,22.606 ; U1.4 -14.732,21.531 -14.732,21.717 -15.621,22.606 ; v1(-9.906,38.862) -9.906,34.036 -15.621,28.321 -15.621,22.606 ; v1(15.748,-13.97) 15.748,-10.795 23.622,-2.921 ; v1(16.256,21.717) 16.256,8.255 21.368,3.143 21.368,-0.667 23.622,-2.921 ; v1(32.893,-35.433) 32.893,-17.272 32.766,-17.145 34.798,-15.113 37.084,-15.113 41.275,-10.922 v1(41.275,-8.763) ; v1(41.275,-0.254) 38.608,-2.921 v1(29.845,-2.921) 23.622,-2.921
+3.3V_2: C8.1 C9.1 R4.1 R12.1 R13.1 R21.1 R29.1 U2.2 U2.4 | length 253.5
  Top Layer w1: v1@-56.134,2.286 v1(-56.134,2.667) -56.134,11.811 -52.578,15.367 -52.578,25.146 -48.768,28.956 -35.557,28.956 R29.1 ; v1(-7.874,39.751) -5.715,37.592 -0.254,37.592 2.54,40.386 12.065,40.386 13.462,41.783 21.968,41.783 R13.1
  Bottom Layer w1: v1(-56.134,2.667) -56.134,-3.429 -49.403,-10.16 -49.403,-24.638 -44.958,-29.083 -44.958,-34.798 -37.592,-42.164 v1(-21.844,-42.164) ; v1(-30.48,33.147) -27.503,36.124 C9.1 C8.1 -21.02,36.898 U2.2 -16.315,36.898 -15.875,37.338 -15.875,37.66 ; U2.4 -15.113,36.898 -15.875,37.66 ; v1@-8.001,39.878 -9.207,41.084 -13.779,41.084 -15.875,38.989 -15.875,37.66 ; v1(26.162,-9.144) 26.67,-8.636 37.719,-8.636 44.323,-2.032 v1(44.323,7.874) 44.323,18.415 v1(29.21,33.528)
+5V: C3.1 C6.1 C7.1 C10.1 C11.1 C12.1 C13.1 D2.1 L1.2 LM1.4 U1.3 U2.3 U3.16 U4.16 | length 259.9
  Top Layer w0.5: v1(30.099,13.843) 30.099,2.667 31.623,1.143 v1(31.623,-10.795)
  Top Layer w1: v1(-37.465,-12.573) -40.386,-9.652 -40.386,-5.08 v1@-34.544,0.762 ; v1(-20.066,15.113) -20.066,23.495 v1(-19.05,24.511) -18.852,24.709 v1(-18.852,39.949)
  Bottom Layer w0.5: D2.1 -46.99,27.559 -29.083,27.559 -25.353,23.829 C7.1 ; C11.1 C11.1 ; U1.3@-18.727,23.829 U1.3 ; L1.2 L1.2@-5.715,32.432 ; C3.1@-5.715,40.005 C3.1 ; LM1.4@6.35,23.749 6.428,23.671 LM1.4 ; U3.16 29.718,-17.526 C12.1 31.381,-14.974 31.623,-14.732 v1(31.623,-10.795)
  Bottom Layer w1: v1@-37.465,-12.446 v1(-37.465,-12.573) -37.465,-13.335 -35.953,-14.847 C13.1 U4.16 U4.16@-32.639,-17.399 ; v1(-34.544,1.016) v1@-20.447,15.113 ; C11.1 U2.3 v1(-18.852,39.949) -15.494,43.307 -8.255,43.307 ; C7.1 C6.1 U1.3@-18.727,23.829 ; v1(-20.066,15.113) v1@-19.939,15.113 ; L1.2 -6.143,26.336 -4.953,25.146 5.588,25.146 6.35,24.384 LM1.4@6.35,23.749 ; L1.2@-5.715,32.432 C3.1@-5.715,40.005 ; C3.1 -8.255,43.307 ; v1(30.099,13.843) 30.099,15.494 26.67,18.923 26.67,40.894 21.209,46.355 4.191,46.355 1.651,48.895 -2.667,48.895 -8.255,43.307
Circle_In: D16.2 STM1.33 | length 77.4
  Bottom Layer w0.3: D16.2 -52.451,12.652 -52.451,6.477 -35.052,-10.922 -32.639,-10.922 -25.908,-17.653 2.286,-17.653 STM1.33
Circle_Out: D3.2 STM1.34 | length 68.4
  Bottom Layer w0.3: D3.2 -23.241,-16.51 3.683,-16.51 STM1.34
CLR_1: STM1.26 U3.10 | length 48.9
  Bottom Layer w0.3: STM1.26 -0.254,-32.893 U3.10
CLR_2: STM1.15 U4.10 | length 19.6
  Bottom Layer w0.3: U4.10 -15.621,-32.766 STM1.15
Data_1: STM1.30 U3.14 | length 34.5
  Bottom Layer w0.3: STM1.30 -0.254,-22.733 U3.14
Data_2: STM1.11 U4.14 | length 34
  Bottom Layer w0.3: U4.14 -31.877,-23.241 -14.986,-23.241 STM1.11
GND: C1.2 C2.2 C3.2 C4.2 C5.2 C6.2 C7.2 C8.2 C9.2 C10.2 C11.2 C12.2 C13.2 D1.1 D4.2 D5.2 D6.2 D7.2 D8.2 D9.2 D10.2 D11.2 D12.2 D13.2 D14.2 D17.2 D18.2 D19.2 D20.2 D21.2 D22.2 D23.2 D24.2 D25.2 D26.2 D27.2 D28.2 D29.2 D30.2 D31.2 D32.2 D33.2 D34.2 D35.2 D36.2 D37.2 D38.2 D39.2 D40.2 D41.2 D42.2 D43.2 D44.2 D45.2 D46.2 D47.2 D48.2 D49.2 D50.2 D51.2 D52.2 D53.2 D54.2 D55.2 D56.2 D57.2 D58.2 D59.2 D60.2 D61.2 D62.2 D63.2 D64.2 D65.2 D66.2 D67.2 D68.2 D69.2 D70.2 D71.2 D72.2 D73.2 D74.2 D75.2 D76.2 D77.2 D78.2 D79.2 D80.2 D81.2 D82.2 LM1.3 LM1.5 P1.1 P2.4 pad.18 R1.1 STM1.19 STM1.39 STM1.40 U1.1 U2.1 U3.8 U4.8 | length 60.5
  Bottom Layer w0.5: U2.1@-18.878,34.624 U2.1 ; U1.1@-18.751,19.257 U1.1 ; D1.1 D1.1@4.728,18.998 ; 17.145,29.972 17.272,29.845 C1.2 ; C2.2@17.792,32.651 C2.2
  Bottom Layer w1: C9.2 C8.2 U2.1@-18.878,34.624 ; C11.2 C10.2 ; C5.2 C4.2 U1.1@-18.751,19.257 ; C7.2 C6.2 ; D1.1@4.728,18.998 LM1.5 ; P2.4 29.845,-42.799 U3.8 ; 17.145,29.972 17.145,32.004 C2.2@17.792,32.651 ; STM1.39 STM1.40
  Bottom Layer w1.5: v1(11.938,37.502) 13.298,38.862 P1.1
  other v1: -33.274,-12.954 29.718,-12.7 3.302,18.923 -40.513,24.257 4.318,29.882 8.128,29.882 11.938,29.882 4.318,33.692 8.128,33.692 11.938,33.692 4.318,37.502 8.128,37.502 -20.828,41.148
Latch_1: STM1.28 U3.12 | length 41.7
  Bottom Layer w0.3: STM1.28 -0.254,-27.813 U3.12
Latch_2: STM1.13 U4.12 | length 26.8
  Bottom Layer w0.3: U4.12 -15.621,-27.686 STM1.13
NetD1_2: D1.2 L1.1 LM1.2 | length 23.9
  Bottom Layer w0.5: L1.1@-1.143,28.448 L1.1
  Bottom Layer w1: L1.1@-1.143,28.448 -1.143,27.94 0.254,26.543 9.271,26.543 10.033,25.781 10.033,23.102 LM1.2 9.828,20.444 D1.2
NetD2_2: D2.2 R1.2 | length 3.8
  Bottom Layer w0.5: D2.2 -43.191,24.765 R1.2
NetD3_1: D3.1 R8.1 | length 3.8
  Bottom Layer w0.5: D3.1 -46.53,9.779 R8.1
NetD4_1: D4.1 Q1.2 | length 6.4
  Top Layer w0.5: D4.1 4.064,15.367 6.114,17.417 Q1.2
NetD5_1: D5.1 Q2.2 | length 9.2
  Top Layer w0.5: Q2.2 -17.762,-2.141 -17.097,-1.476 D5.1
NetD6_1: D6.1 D7.1 D8.1 D9.1 D10.1 D11.1 D12.1 D13.1 D14.1 Q3.2 | length 113.9
  Top Layer w0.5: D11.1 16.311,-8.2 18.016,-6.495 Q3.2
  Bottom Layer w0.3: D6.1@-12.96,5.275 cw(c-9.551,6.901) D7.1@-9.021,10.64 ; D6.1 -12.7,5.08 -15.24,2.54 -15.24,-4.826 -12.446,-7.62 D13.1 ccw(c-7.761,-8.514) -6.604,-12.108 D14.1 -5.842,-12.065 -4.826,-11.049 4.445,-11.049 D12.1 ; D7.1@-8.916,10.649 cw(c-5.144,10.476) D8.1@-2.914,13.524 ; D8.1 cw(c3.15,9.754) D9.1 ; D12.1@5.983,-12.654 ccw(c7.575,-9.23) D11.1@11.309,-8.664 ; D9.1@10.157,9.921 cw(c10.355,6.15) D10.1@13.607,4.23 ; D11.1@11.176,-8.2 ccw(c9.84,-1.745) D10.1
NetD16_1: D16.1 R9.1 | length 3.7
  Bottom Layer w0.5: D16.1 R9.1
NetD17_1: D17.1 Q4.2 | length 17.7
  Top Layer w0.3: D17.1 -0.254,-17.526 0.312,-18.092 0.312,-21.14 v2(0.381,-21.209) ; v2@5.715,-21.463 6.35,-21.463 8.618,-23.731 Q4.2
  Bottom Layer w0.3: v2(0.381,-21.209) 5.334,-21.209 v2(5.461,-21.336)
NetD18_1: D18.1 Q5.2 | length 7.7
  Top Layer w0.5: D18.1 15.494,-2.413 17.635,-0.272 Q5.2
NetD19_1: D19.1 D20.1 D21.1 D22.1 D23.1 D24.1 D25.1 D26.1 D27.1 D28.1 Q6.2 | length 94.1
  Top Layer w0.5: D28.1 -28.904,-48.97 Q6.2
  Bottom Layer w0.3: D19.1@-61.073,-7.632 cw(c-60.854,-10.657) D20.1@-60.54,-13.673 ; D20.1@-59.993,-13.719 cw(c-59.48,-16.707) D21.1@-58.871,-19.678 ; D21.1@-58.089,-19.452 cw(c-57.285,-22.376) -55.778,-25.008 ; D22.1@-56.388,-25.273 ccw(c-57.285,-22.376) -55.778,-25.008 ; D22.1@-55.992,-25.081 cw(c-54.905,-27.912) -55.778,-25.008 ; D23.1@-53.729,-30.707 ccw(c-54.905,-27.912) -55.778,-25.008 ; D23.1@-53.32,-30.725 cw(c-51.961,-33.436) D24.1@-50.517,-36.102 ; D24.1@-49.818,-35.869 cw(c-48.2,-38.434) D25.1@-46.089,-40.61 ; D25.1@-46.501,-40.946 ccw(c-48.2,-38.434) D25.1@-46.089,-40.61 ; D25.1@-46.12,-40.635 cw(c-44.258,-43.028) D25.1@-46.089,-40.61 ; D26.1@-42.321,-45.361 ccw(c-44.258,-43.028) -41.744,-44.724 ; D26.1@-41.948,-44.937 cw(c-39.655,-46.922) -41.744,-44.724 ; D27.1@-37.3,-48.832 ccw(c-39.655,-46.922) -41.744,-44.724 ; D27.1@-37.285,-48.906 cw(c-34.809,-50.656) D28.1@-32.278,-52.327 ; D25.1@-46.089,-40.61 cw(c-44.258,-43.028) -41.744,-44.724
NetD29_1: D29.1 D30.1 D31.1 D32.1 D33.1 D34.1 D35.1 D36.1 D37.1 D38.1 Q7.2 | length 92
  Top Layer w0.5: Q7.2 42.12,35.547 D37.1
  Bottom Layer w0.3: D29.1@4.671,61.425 ccw(c7.703,61.49) D30.1@10.671,60.872 ; D30.1@10.709,60.729 ccw(c13.733,60.497) D31.1@16.627,59.591 ; D31.1@16.474,58.986 ccw(c19.46,58.459) D32.1@22.251,57.274 ; D32.1@22.215,57.088 ccw(c25.136,56.271) 27.491,54.36 ; D33.1@27.55,54.528 ccw(c30.376,53.429) 27.491,54.36 ; D33.1@27.797,54.818 cw(c25.136,56.271) 27.491,54.36 ; D34.1@32.883,51.722 cw(c30.376,53.429) 27.491,54.36 ; D34.1@33.054,51.754 ccw(c35.611,50.124) D35.1@37.699,47.925 ; D35.1@37.736,47.961 cw(c35.611,50.124) D35.1@37.699,47.925 ; D35.1@37.917,48.243 ccw(c40.303,46.37) D35.1@37.699,47.925 ; 42.206,44.009 cw(c40.303,46.37) D35.1@37.699,47.925 ; D36.1@42.493,44.337 ccw(c44.683,42.239) 46.346,39.703 ; D37.1@47.034,40.165 ccw(c49.008,37.863) D38.1@50.414,35.176
NetD39_1: D39.1 Q8.2 | length 12.7
  Top Layer w0.5: D39.1 -1.476,52.657 -0.399,51.58 Q8.2
NetD40_1: D40.1 Q9.2 | length 10.1
  Top Layer w0.5: D40.1 -61.529,-1.923 Q9.2
  Top Layer w1: D40.1 D40.1@-61.77,-1.524
NetD41_1: D41.1 D42.1 D43.1 D44.1 D45.1 D46.1 D47.1 D48.1 D49.1 D50.1 Q10.2 | length 95.5
  Top Layer w0.5: D45.1 -3.792,-61.45 Q10.2
  Bottom Layer w0.3: -27.097,-54.882 cw(c-24.461,-56.381) D42.1@-21.779,-57.796 ; -21.509,-57.295 cw(c-18.873,-58.794) D43.1@-16.191,-60.209 ; D43.1@-15.831,-59.304 cw(c-13.061,-60.537) -10.048,-60.196 ; D44.1@-10.253,-61.682 ccw(c-13.061,-60.537) -10.048,-60.196 ; D44.1@-10.147,-60.539 cw(c-7.189,-61.208) -10.048,-60.196 ; D46.1@4.887,-61.541 cw(c7.911,-61.322) 10.804,-60.414 ; D46.1@4.953,-62.103 cw(c0.436,-60.077) -4.212,-61.782 ccw(c-7.189,-61.208) -10.048,-60.196 ; D47.1@10.839,-60.696 cw(c13.828,-60.182) 10.804,-60.414 ; D47.1@10.922,-60.96 ccw(c7.911,-61.322) 10.804,-60.414 ; D48.1@16.74,-59.53 cw(c19.571,-58.443) 16.571,-58.89 ; D48.1@16.789,-59.526 ccw(c13.828,-60.182) 16.571,-58.89 ; D49.1@22.346,-57.222 ccw(c19.571,-58.443) 16.571,-58.89 ; D49.1@22.455,-57.244 cw(c25.286,-56.157) D50.1@28.061,-54.936 ; 10.804,-60.414 cw(c13.828,-60.182) 16.571,-58.89
NetD51_1: D51.1 D52.1 D53.1 D54.1 D55.1 D56.1 D57.1 D58.1 D59.1 D60.1 Q11.2 | length 159.9
  Top Layer w0.5: Q11.2 55.771,3.574 59.882,7.685 D51.1
  Bottom Layer w0.3: D60.1@-30.514,54.073 ccw(c-27.848,55.517) D59.1@-24.969,56.47 ; D59.1@-25.137,56.876 cw(c-27.848,55.517) D59.1@-24.969,56.47 ; D59.1@-25.119,56.777 ccw(c-22.324,57.953) D59.1@-24.969,56.47 ; D58.1@-19.493,59.04 cw(c-22.324,57.953) D58.1@-19.362,58.602 ; D58.1 ccw(c-16.534,59.698) D58.1@-19.362,58.602 ; D57.1 cw(c-16.534,59.698) D58.1@-19.362,58.602 ; D57.1@-13.395,59.931 ccw(c-10.619,61.152) D56.1@-7.64,61.718 ; D56.1 -2.391,56.261 9.525,56.261 14.351,51.435 20.447,51.435 26.67,45.212 30.988,45.212 45.847,30.353 53.852,30.353 D55.1 ; D55.1@53.317,30.144 ccw(c55.056,27.66) 55.675,24.691 ; 55.881,24.818 ccw(c57.368,22.175) 55.675,24.691 ; D54.1@56.192,24.848 cw(c55.056,27.66) 55.675,24.691 ; D53.1@58.153,19.237 ccw(c59.374,16.461) D52.1@59.94,13.482 ; D53.1@58.222,19.265 cw(c57.368,22.175) 55.675,24.691 ; 59.755,13.405 ccw(c60.698,10.523) D51.1@60.968,7.503 ; D59.1@-24.969,56.47 ccw(c-22.324,57.953) D58.1@-19.362,58.602
NetD61_1: D61.1 Q12.2 | length 8.5
  Top Layer w0.5: Q12.2 1.415,-61.359 D61.1
NetD62_1: D62.1 Q13.2 | length 13
  Top Layer w0.5: Q13.2 53.485,-1.76 56.896,1.651 D62.1
NetD63_1: D63.1 D64.1 D65.1 D66.1 D67.1 D68.1 D69.1 D70.1 D71.1 D72.1 Q14.2 | length 90.7
  Top Layer w0.5: Q14.2 32.756,-51.552 D63.1
  Bottom Layer w0.3: D63.1@33.289,-52.035 cw(c35.854,-50.416) 37.843,-48.128 ; D64.1@38.137,-48.584 cw(c40.53,-46.722) 37.843,-48.128 ; D64.1@38.338,-48.678 ccw(c35.854,-50.416) 37.843,-48.128 ; D65.1@42.497,-44.314 cw(c45.033,-42.651) D66.1@47.131,-40.461 ; D65.1@42.832,-44.748 ccw(c40.53,-46.722) 37.843,-48.128 ; 46.422,-39.92 cw(c48.783,-38.017) D67.1@50.656,-35.631 ; D67.1@50.28,-35.349 cw(c52.225,-33.022) D68.1@53.596,-30.317 ; D68.1@53.754,-30.343 cw(c55.461,-27.836) D69.1@56.56,-25.01 ; D69.1@56.215,-24.876 cw(c57.668,-22.215) D70.1@58.485,-19.294 ; D70.1@58.798,-19.33 cw(c59.983,-16.539) D71.1@60.51,-13.553 ; D71.1@59.972,-13.452 cw(c60.878,-10.558) D72.1@61.11,-7.534
NetD73_1: D73.1 D74.1 D75.1 D76.1 D77.1 D78.1 D79.1 D80.1 D81.1 D82.1 Q15.2 | length 95.7
  Top Layer w0.3: D74.1@-40.513,46.355 D74.1
  Top Layer w0.5: D74.1 -33.725,40.075 Q15.2
  Bottom Layer w0.3: D82.1@-62.036,4.593 ccw(c-61.462,7.57) D81.1@-60.395,10.409 ; D81.1@-61.19,10.534 ccw(c-60.327,13.44) D81.1@-60.395,10.409 ; D81.1@-60.793,10.528 cw(c-61.462,7.57) D81.1@-60.395,10.409 ; D80.1@-60.031,16.476 ccw(c-58.886,19.284) D80.1@-59.244,16.273 ; D80.1@-59.371,16.318 cw(c-60.327,13.44) D80.1@-59.244,16.273 ; D79.1@-58.05,22.16 ccw(c-56.635,24.842) D79.1@-57.34,21.893 ; D79.1@-57.653,22.054 cw(c-58.886,19.284) D79.1@-57.34,21.893 ; D78.1@-55.136,27.478 cw(c-56.635,24.842) D79.1@-57.34,21.893 ; D78.1@-55.129,27.494 ccw(c-53.714,30.176) D77.1@-51.928,32.626 ; D77.1@-52.215,32.812 cw(c-53.714,30.176) D77.1@-51.928,32.626 ; D77.1@-52.2,32.786 ccw(c-50.529,35.317) D77.1@-51.928,32.626 ; D76.1@-48.832,37.935 ccw(c-46.922,40.29) D75.1@-44.937,42.583 ; D76.1@-48.779,37.793 cw(c-50.529,35.317) D77.1@-51.928,32.626 ; D75.1@-44.52,42.174 ccw(c-42.388,44.33) -39.812,45.93 ; D74.1@-40.281,46.385 ccw(c-37.948,48.322) -39.812,45.93 ; D74.1@-40.188,46.418 cw(c-42.388,44.33) -39.812,45.93 ; -39.837,45.995 ccw(c-37.973,48.387) D73.1@-35.579,50.249 ; D81.1@-60.395,10.409 ccw(c-60.327,13.44) D80.1@-59.244,16.273 ; D80.1@-59.244,16.273 ccw(c-58.886,19.284) D79.1@-57.34,21.893
NetQ1_1: Q1.1 R5.1 | length 2.9
  Top Layer w0.3: R5.1 Q1.1@5.77,20.254
  Top Layer w0.5: Q1.1@5.77,20.254 Q1.1
NetQ1_3: Q1.3 R2.2 | length 3.3
  Top Layer w0.5: Q1.3 10.033,20.973 R2.2
NetQ2_1: Q2.1 R6.1 | length 3.1
  Top Layer w0.3: R6.1 -25.987,-3.937 Q2.1
NetQ2_3: Q2.3 R3.2 | length 4
  Top Layer w0.5: R3.2 -25.291,2.159 Q2.3
NetQ3_1: Q3.1 R7.1 | length 5.4
  Top Layer w0.3: Q3.1 23.368,-5.413 R7.1@27.088,-5.413
  Top Layer w0.5: R7.1@27.088,-5.413 R7.1
  Top Layer w1: R7.1@27.106,-5.273 R7.1
NetQ3_3: Q3.3 R4.2 | length 3.5
  Top Layer w0.5: Q3.3 22.497,-9.906 R4.2
NetQ4_1: Q4.1 R14.1 | length 7.2
  Top Layer w0.3: R14.1@2.354,-28.437 R14.1 6.404,-28.437 Q4.1
NetQ4_3: Q4.3 R10.2 | length 11.1
  Top Layer w0.3: R10.2 -1.662,-26.67 2.54,-26.67 3.937,-25.273 Q4.3
NetQ5_1: Q5.1 R15.1 | length 2.7
  Top Layer w0.3: Q5.1 22.588,-0.272 R15.1
NetQ5_3: Q5.3 R11.2 | length 6
  Top Layer w0.5: Q5.3 26.906,-2.522 R11.2@26.985,-2.601
  Top Layer w1: R11.2@26.985,-2.601 R11.2
NetQ6_1: Q6.1 R16.1 | length 4
  Top Layer w0.3: -26.544,-42.355 R16.1
  Top Layer w0.36: Q6.1 -26.544,-42.355
NetQ6_3: Q6.3 R12.2 | length 4.9
  Top Layer w0.3: R12.2@-22.606,-43.945 R12.2
  Top Layer w0.5: Q6.3 -24.082,-45.672 R12.2
NetQ7_1: Q7.1 R17.1 | length 3
  Top Layer w0.3: R17.1@34.904,31.519 Q7.1
  Top Layer w0.5: R17.1@34.904,31.519 R17.1
NetQ7_3: Q7.3 R13.2 | length 3.9
  Top Layer w0.5: R13.2 31.116,35.434 32.366,36.684 Q7.3
NetQ8_1: Q8.1 R22.1 | length 3.4
  Top Layer w0.3: Q8.1 -0.399,47.273 R22.1
NetQ8_3: Q8.3 R18.2 | length 4.3
  Top Layer w0.5: R18.2 -4.445,46.972 Q8.3
NetQ9_1: Q9.1 R23.1 | length 8
  Top Layer w0.3: v1(-46.355,-2.286) -45.223,-1.154 R23.1
  Bottom Layer w0.3: -49.064,-0.889 -47.794,-2.159 v1@-46.863,-2.159
  Bottom Layer w0.5: v1(-50.165,-0.889) -49.064,-0.889
NetQ9_3: Q9.3 R19.2 | length 5.4
  Bottom Layer w0.5: v1(-51.054,-5.08) -45.974,-5.08 v1(-45.72,-5.334)
NetQ10_1: Q10.1 R24.1 | length 3.2
  Top Layer w0.3: R24.1@-5.625,-49.795 Q10.1
  Top Layer w0.5: R24.1 R24.1@-5.625,-49.795
NetQ10_3: Q10.3 R20.2 | length 5.7
  Top Layer w0.5: R20.2 -1.905,-49.53 -1.542,-49.893 Q10.3
NetQ11_1: Q11.1 R25.1 | length 5.4
  Top Layer w0.3: R25.1 47.673,2.921 Q11.1
NetQ11_3: Q11.3 R21.2 | length 3.7
  Top Layer w0.5: R21.2 47.988,7.112 Q11.3
NetQ12_1: Q12.1 R30.1 | length 4.9
  Top Layer w0.3: R30.1 0.762,-50.975 Q12.1
NetQ12_3: Q12.3 R26.2 | length 3.4
  Top Layer w0.3: R26.2@5.073,-49.802 R26.2
  Top Layer w0.5: Q12.3 5.08,-51.163 R26.2
NetQ13_1: Q13.1 R31.1 | length 3.1
  Top Layer w0.3: R31.1@46.119,-3.933 R31.1 48.3,-1.76 Q13.1
NetQ13_3: Q13.3 R27.2 | length 6.1
  Top Layer w0.5: R27.2 49.258,0.508 Q13.3
NetQ14_1: Q14.1 R32.1 | length 3.4
  Top Layer w0.3: R32.1@29.717,-41.657 30.68,-40.694 Q14.1
  Top Layer w0.5: R32.1 R32.1@29.717,-41.657
NetQ14_3: Q14.3 R28.2 | length 4.4
  Top Layer w0.5: R28.2 34.902,-38.458 Q14.3
NetQ15_1: Q15.1 R33.1 | length 3.5
  Top Layer w0.3: Q15.1 R33.1@-28.699,38.732 ; R33.1@-28.575,38.357 R33.1
  Top Layer w0.5: R33.1@-28.699,38.732 R33.1
NetQ15_3: Q15.3 R29.2 | length 4.4
  Top Layer w0.3: R29.2 R29.2@-32.515,34.544
  Top Layer w0.5: Q15.3 -33.942,35.466 R29.2
"Out Enable_1": STM1.29 U3.13 | length 38.1
  Bottom Layer w0.3: STM1.29 -0.254,-25.273 U3.13
"Out Enable_2": STM1.12 U4.13 | length 30.4
  Bottom Layer w0.3: U4.13 -15.621,-25.146 STM1.12
Pin1: R5.2 U3.15 | length 101.9
  Top Layer w0.3: v2@2.159,14.859 0.254,16.764 0.254,22.987 1.154,23.887 R5.2 ; v2(6.223,13.716) 8.382,13.716 9.398,14.732 v1@9.779,14.732 ; v1(13.97,13.081) 24.257,13.081 29.464,18.288 31.877,18.288 39.37,10.795 v1(39.37,5.715) ; U3.15 30.279,-20.193 31.549,-21.463 41.402,-21.463 v1@41.783,-21.082 ; v1(39.37,1.143) 39.37,-9.525 v1@42.926,-13.081
  Bottom Layer w0.3: v2(2.413,14.478) 5.461,14.478 v2(6.223,13.716) ; v1(10.16,14.859) 12.319,14.859 v1@13.843,13.335 ; v1@39.37,1.397 v1(39.37,5.715) ; v1(42.037,-20.701) 43.307,-19.431 v1(43.307,-13.335)
Pin2: R6.2 U3.1 | length 143.5
  Top Layer w0.3: R6.2 -28.332,-13.6 -29.718,-14.986 -42.545,-14.986 -43.307,-15.748 -43.307,-27.178 -41.529,-28.956 -10.097,-28.956 -4.826,-34.227 v1(-4.826,-37.465) ; v1(2.286,-37.465) 4.064,-39.243 25.019,-39.243 25.527,-38.735 25.527,-33.274 27.178,-31.623 33.401,-31.623 34.798,-30.226 v1(34.798,-29.083) ; U3.1@36.957,-17.399 U3.1
  Bottom Layer w0.3: v1(-4.826,-37.465) v1(2.286,-37.465) ; v1@34.544,-29.083 34.544,-19.304 36.195,-17.653 U3.1
Pin3: R14.2 U3.2 | length 39.8
  Top Layer w0.3: R14.2 15.229,-30.237 26.416,-19.05 30.988,-19.05 32.131,-20.193 U3.2
Pin4: pad.19 R15.2 U3.3 | length 41.9
  Top Layer w0.3: v1(35.687,-1.016) 35.687,-10.795 43.942,-19.05 43.942,-21.463 42.672,-22.733 U3.3
  Bottom Layer w0.3: pad.19 34.671,1.397 35.814,0.254 35.687,0.127 v1(35.687,-1.016)
Pin5: R22.2 U3.4 | length 104
  Top Layer w0.3: U3.4 43.307,-25.273 45.466,-23.114 45.466,-18.288 37.973,-10.795 37.973,-0.762 v1(37.592,-0.381)
  Bottom Layer w0.3: v1(2.413,43.307) 20.574,43.307 23.622,40.259 23.622,14.224 37.592,0.254 v1(37.592,-0.381)
Pin6: R23.2 U3.5 | length 103.2
  Top Layer w0.3: v1(-37.211,-5.588) v1(-31.242,-5.588) ; v1(25.781,-16.256) 27.813,-16.256 28.321,-15.748 38.227,-15.748 39.878,-17.399 v1(39.878,-19.05)
  Bottom Layer w0.3: v1(-42.926,0.381) -42.926,0.127 v1(-37.211,-5.588) ; v1(-31.242,-5.588) -29.718,-5.588 -20.066,-15.24 24.765,-15.24 v1(25.781,-16.256) ; U3.5 38.862,-27.813 39.878,-26.797 v1(39.878,-19.05)
Pin7: R30.2 U3.6 | length 46
  Bottom Layer w0.3: v1(1.651,-45.212) 1.778,-45.339 9.906,-45.339 10.414,-44.831 10.414,-42.164 11.303,-41.275 29.083,-41.275 35.052,-35.306 35.052,-30.861 35.56,-30.353 U3.6
Pin8: R31.2 U3.7 | length 35.7
  Top Layer w0.3: U3.7 39.624,-32.893 47.244,-25.273 47.244,-8.636 44.323,-5.715 R31.2
Pin9: R7.2 U4.15 | length 74.7
  Top Layer w0.3: U4.15 -30.226,-20.066 -27.813,-17.653 -4.699,-17.653 -1.778,-14.732 -1.778,-12.446 -0.381,-11.049 7.239,-11.049 9.144,-12.954 13.208,-12.954 15.367,-10.795 19.177,-10.795 21.336,-12.954 25.4,-12.954 28.967,-9.387 R7.2
Pin10: R16.2 U4.1 | length 38
  Bottom Layer w0.3: U4.1 -42.672,-17.526 -43.434,-18.288 -43.434,-33.02 -42.418,-34.036 -38.608,-34.036 -34.544,-38.1 v1(-25.908,-38.1)
Pin11: R24.2 U4.2 | length 55.3
  Bottom Layer w0.3: U4.2 -41.148,-20.066 -42.291,-21.209 -42.291,-30.861 -41.656,-31.496 -38.989,-31.496 -33.655,-36.83 -28.956,-36.83 -28.575,-36.449 -23.368,-36.449 -11.811,-48.006 v1(-6.858,-48.006) v1@-6.731,-48.006
Pin12: R32.2 U4.3 | length 88
  Top Layer w0.3: v1(-36.449,-30.353) -36.449,-34.29 -34.036,-36.703 -22.86,-36.703 -20.955,-38.608 -15.621,-38.608 v1(-14.224,-40.005) ; v1(13.97,-45.72) 19.305,-40.385 R32.2
  Bottom Layer w0.3: U4.3 -37.465,-22.606 -36.449,-23.622 v1(-36.449,-30.353) ; v1(-14.224,-40.005) -8.001,-46.228 -1.27,-46.228 0,-47.498 12.192,-47.498 v1(13.97,-45.72)
Pin13: R17.2 U4.4 | length 103.3
  Top Layer w0.3: U4.4 -37.592,-25.146 -35.433,-22.987 -35.433,-19.939 -34.29,-18.796 -30.988,-18.796 -15.621,-3.429 -12.7,-3.429 -10.826,-1.555 ; -10.888,-1.493 cw(c-0.381,0.508) 6.466,8.725 27.839,30.098 R17.2
Pin14: R25.2 U4.5 | length 106.2
  Top Layer w0.3: U4.5 -38.354,-27.686 -37.084,-26.416 -30.353,-26.416 -29.464,-25.527 1.119,-25.527 2.794,-23.852 2.794,-17.526 5.969,-14.351 13.208,-14.351 15.367,-12.192 18.669,-12.192 20.828,-14.351 30.988,-14.351 33.528,-11.811 33.528,-0.762 37.211,2.921 R25.2
Pin15: R33.2 U4.6 | length 82.3
  Top Layer w0.3: U4.6 -41.656,-30.226 -48.006,-23.876 -48.006,1.016 -44.323,4.699 -44.323,9.74 -41.744,12.319 -38.224,12.319 -27.177,23.367 R33.2
Pulse_1: STM1.27 U3.11 | length 45.3
  Bottom Layer w0.3: STM1.27 -0.254,-30.353 U3.11
Pulse_2: STM1.14 U4.11 | length 23.2
  Bottom Layer w0.3: U4.11 -15.621,-30.226 STM1.14
USART1_RX: P2.2 STM1.7 | length 8.1
  Bottom Layer w0.3: P2.2 STM1.7
USART1_TX: P2.3 STM1.6 | length 8.1
  Bottom Layer w0.3: P2.3 STM1.6
pads on no net: STM1.1 STM1.2 STM1.3 STM1.4 STM1.5 STM1.8 STM1.9 STM1.10 STM1.16 STM1.17 STM1.18 STM1.20 STM1.21 STM1.22 STM1.23 STM1.24 STM1.25 STM1.31 STM1.32 STM1.35 STM1.36 STM1.37 U3.9 U4.7 U4.9

## Polygon pours and split planes (outlines as drawn)
GND on Top Layer "Top Layer-GND" (solid, remove dead copper, pour order 0): -82.423,70.739 -82.042,70.358 82.296,70.358 82.296,-68.072 76.962,-73.406 76.073,-72.517 -81.788,-72.517
GND on Bottom Layer "Bottom Layer-GND" (solid, remove dead copper, pour order 2): -73.787,67.437 76.2,67.437 89.535,54.102 89.535,-60.96 74.168,-60.96 58.801,-76.327 54.864,-72.39 -55.499,-72.39 -55.499,-61.468 -80.137,-36.83

## Keep-outs
Keep-Out Layer:
  circle w0.254: c0,0 r67
  circle w0.2: c-0.024,-0.024 r65

## Silkscreen, mask and mechanical layers (free items; w line width, h text height)
Drill Drawing:
  text ".LEGEND" at 70.056,-59.944 h1.52
  text "Drill Drawing." at 70.056,-62.484 h1.52

## Text inside footprints (layer, text, board x,y; h text height)
C1: Bottom Overlay "+" at 17.145,23.924 h1.52 r270
C3: Bottom Overlay "+" at -8.255,41.148 h1.52 r180
STM1: Bottom Overlay "STM32F103" at 25.146,-38.481 h1.52 r270